# Altium PCB Device.PcbDoc (part 1 of 4)
Units mm, origin at the board's own origin, x right, y up, seen from the top; angles counter-clockwise.
Board outline 139.06 x 99.82 mm, 4 copper layers (Top Layer, GND, PWR, Bottom Layer), stack 1.233 mm thick; 189 components, 163 nets, 636 pads, 1007 vias.
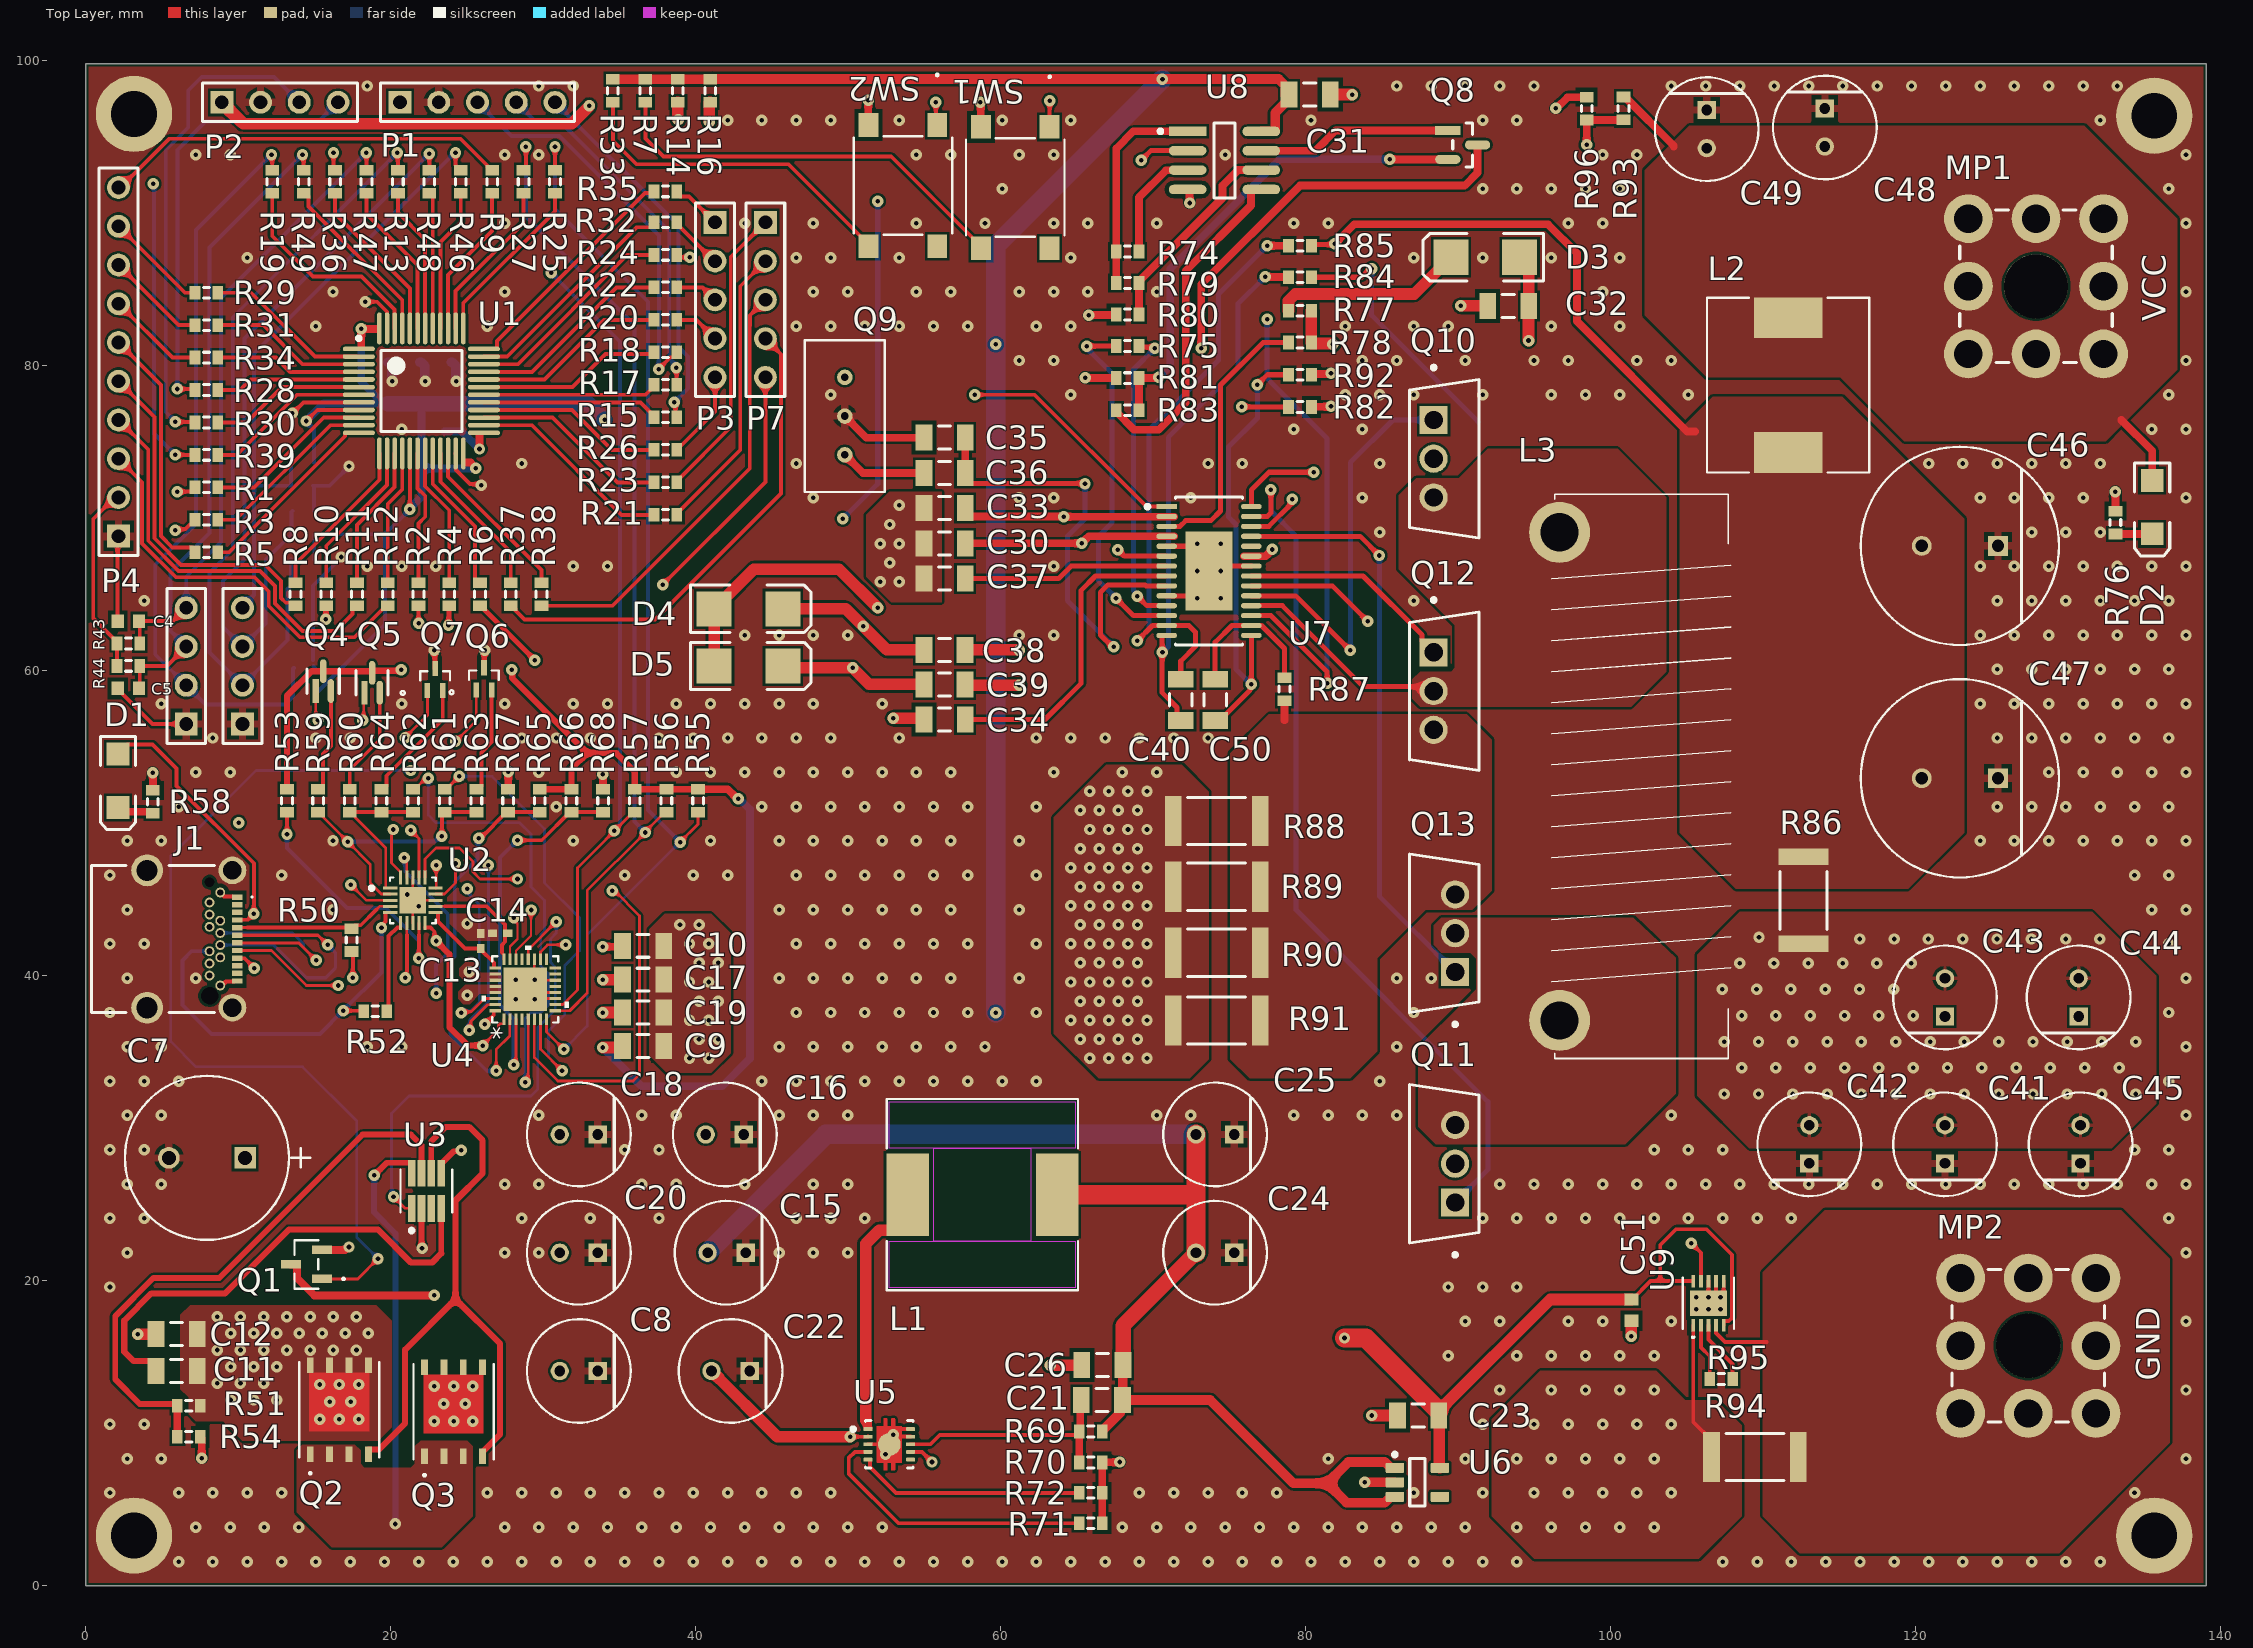
[diagram p0: Top Layer view]
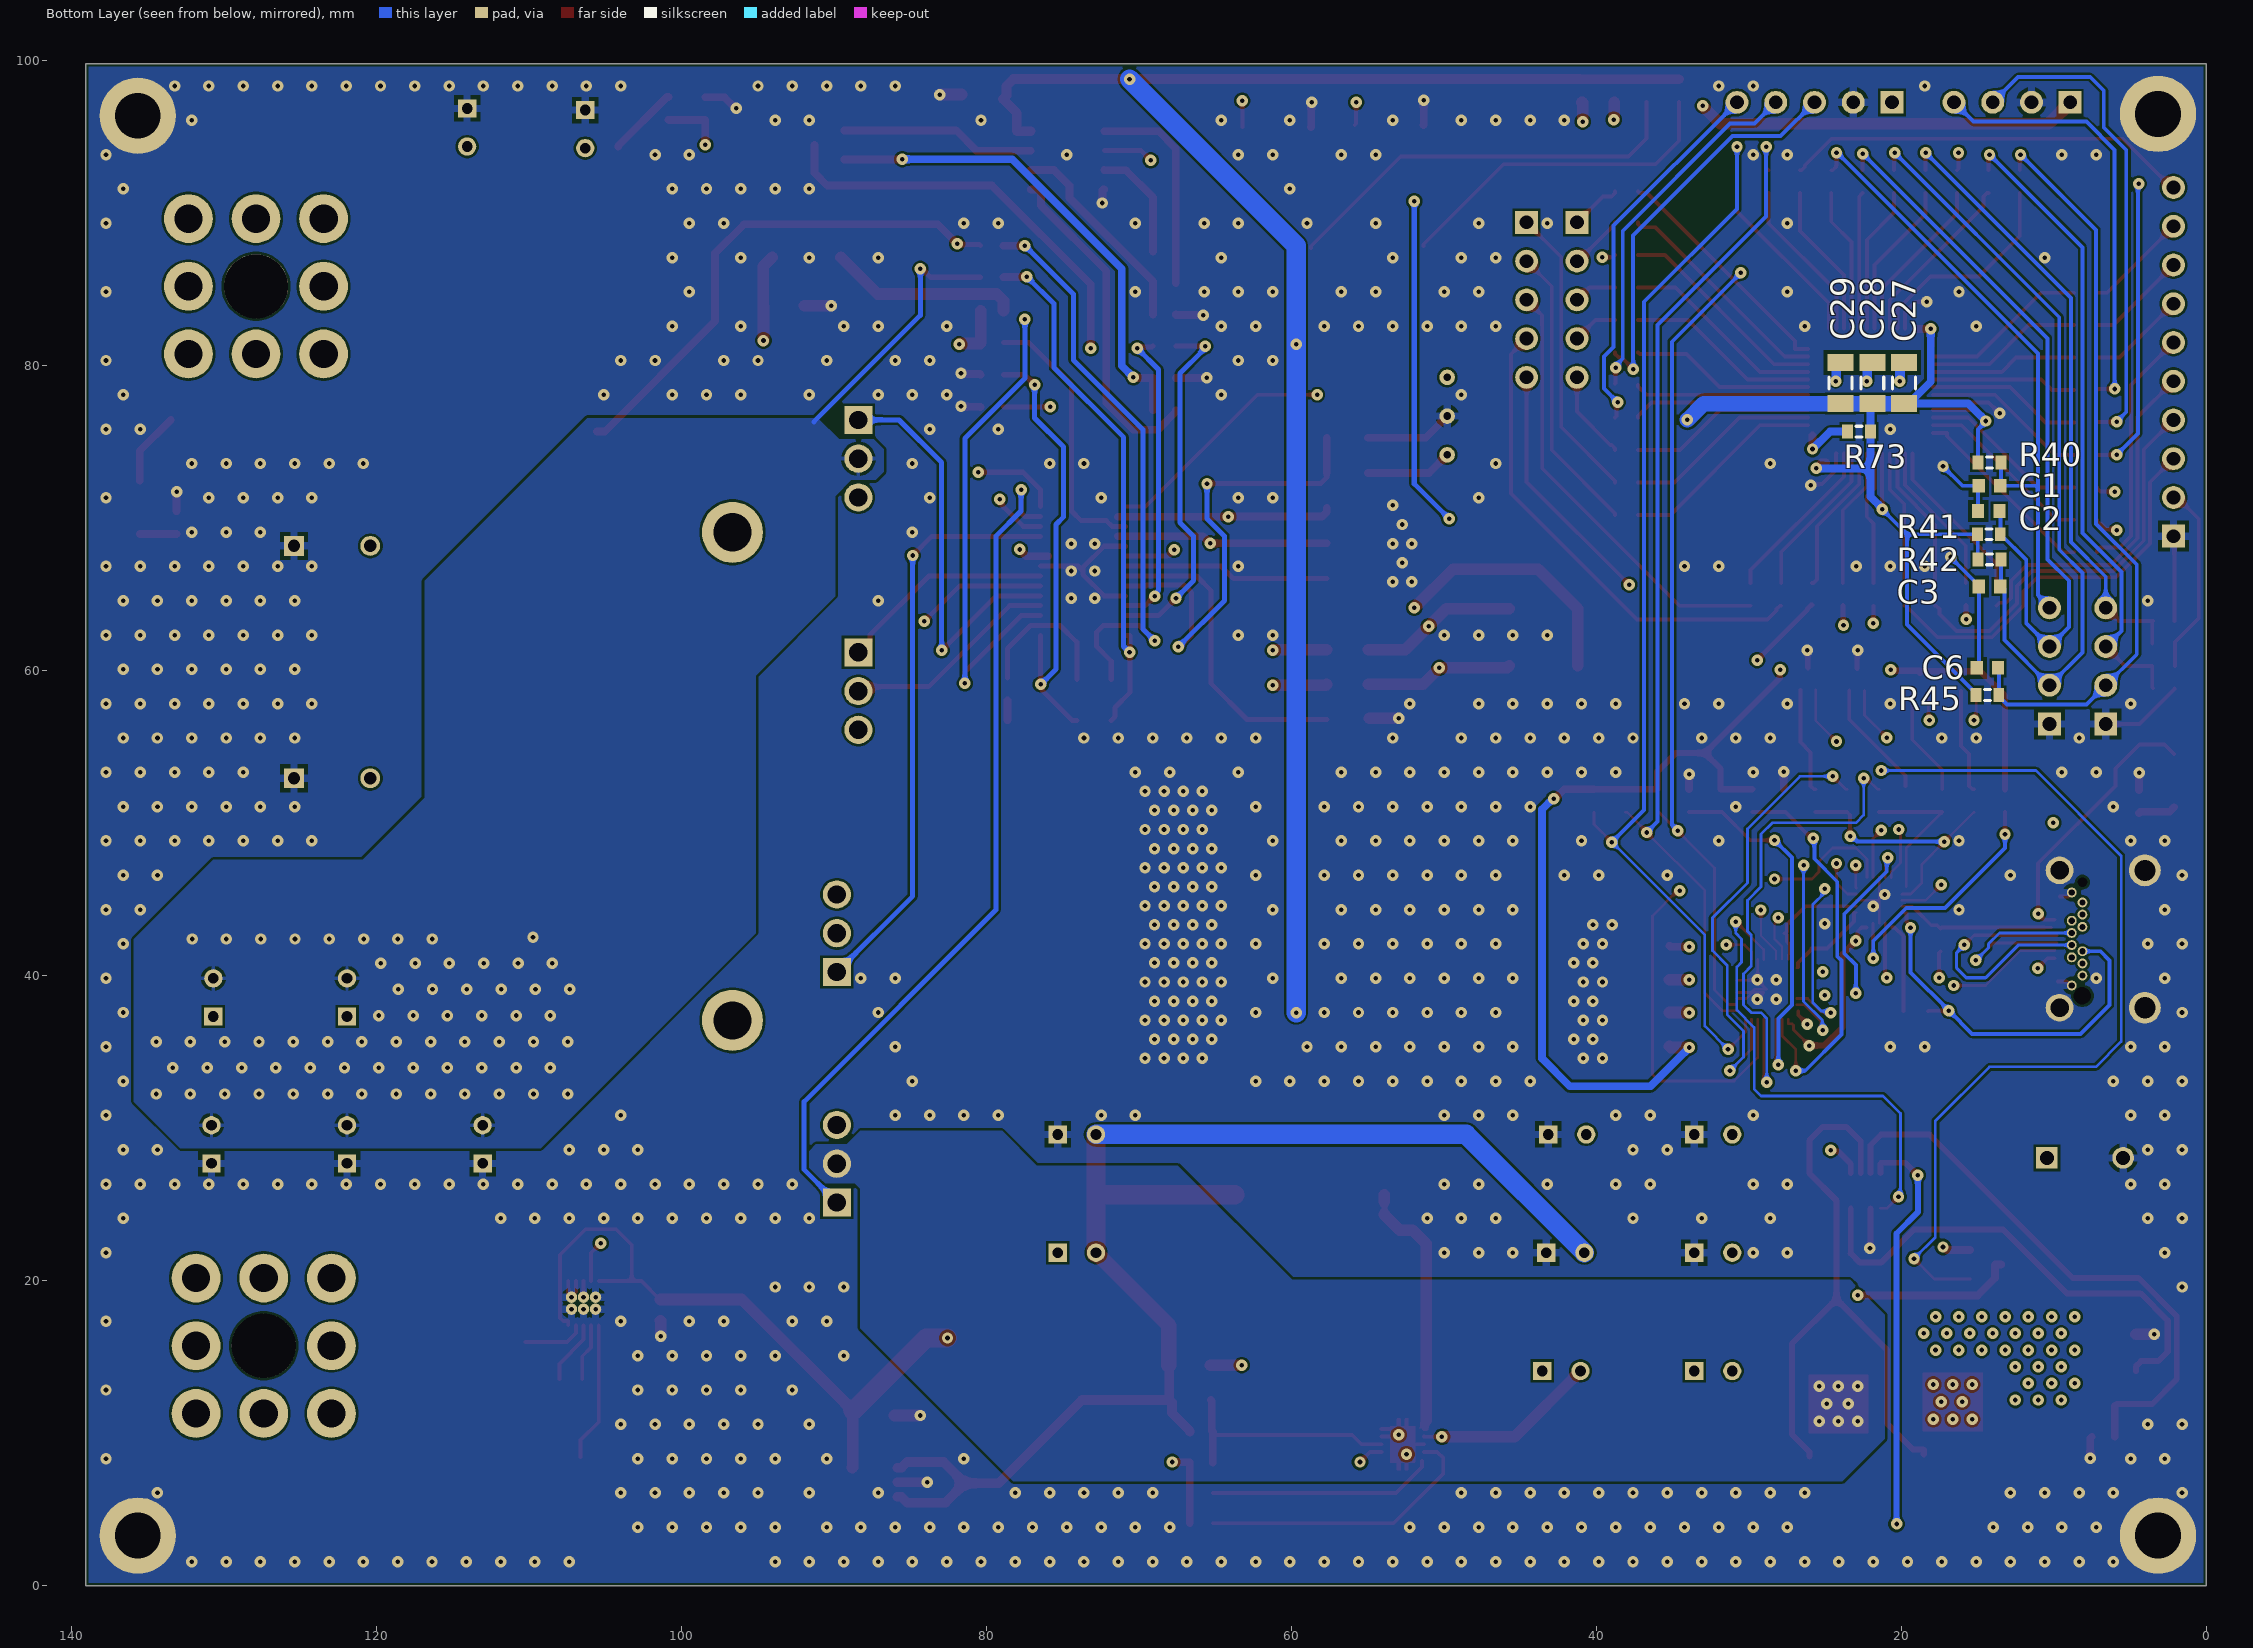
[diagram p1: Bottom Layer view, seen from below]
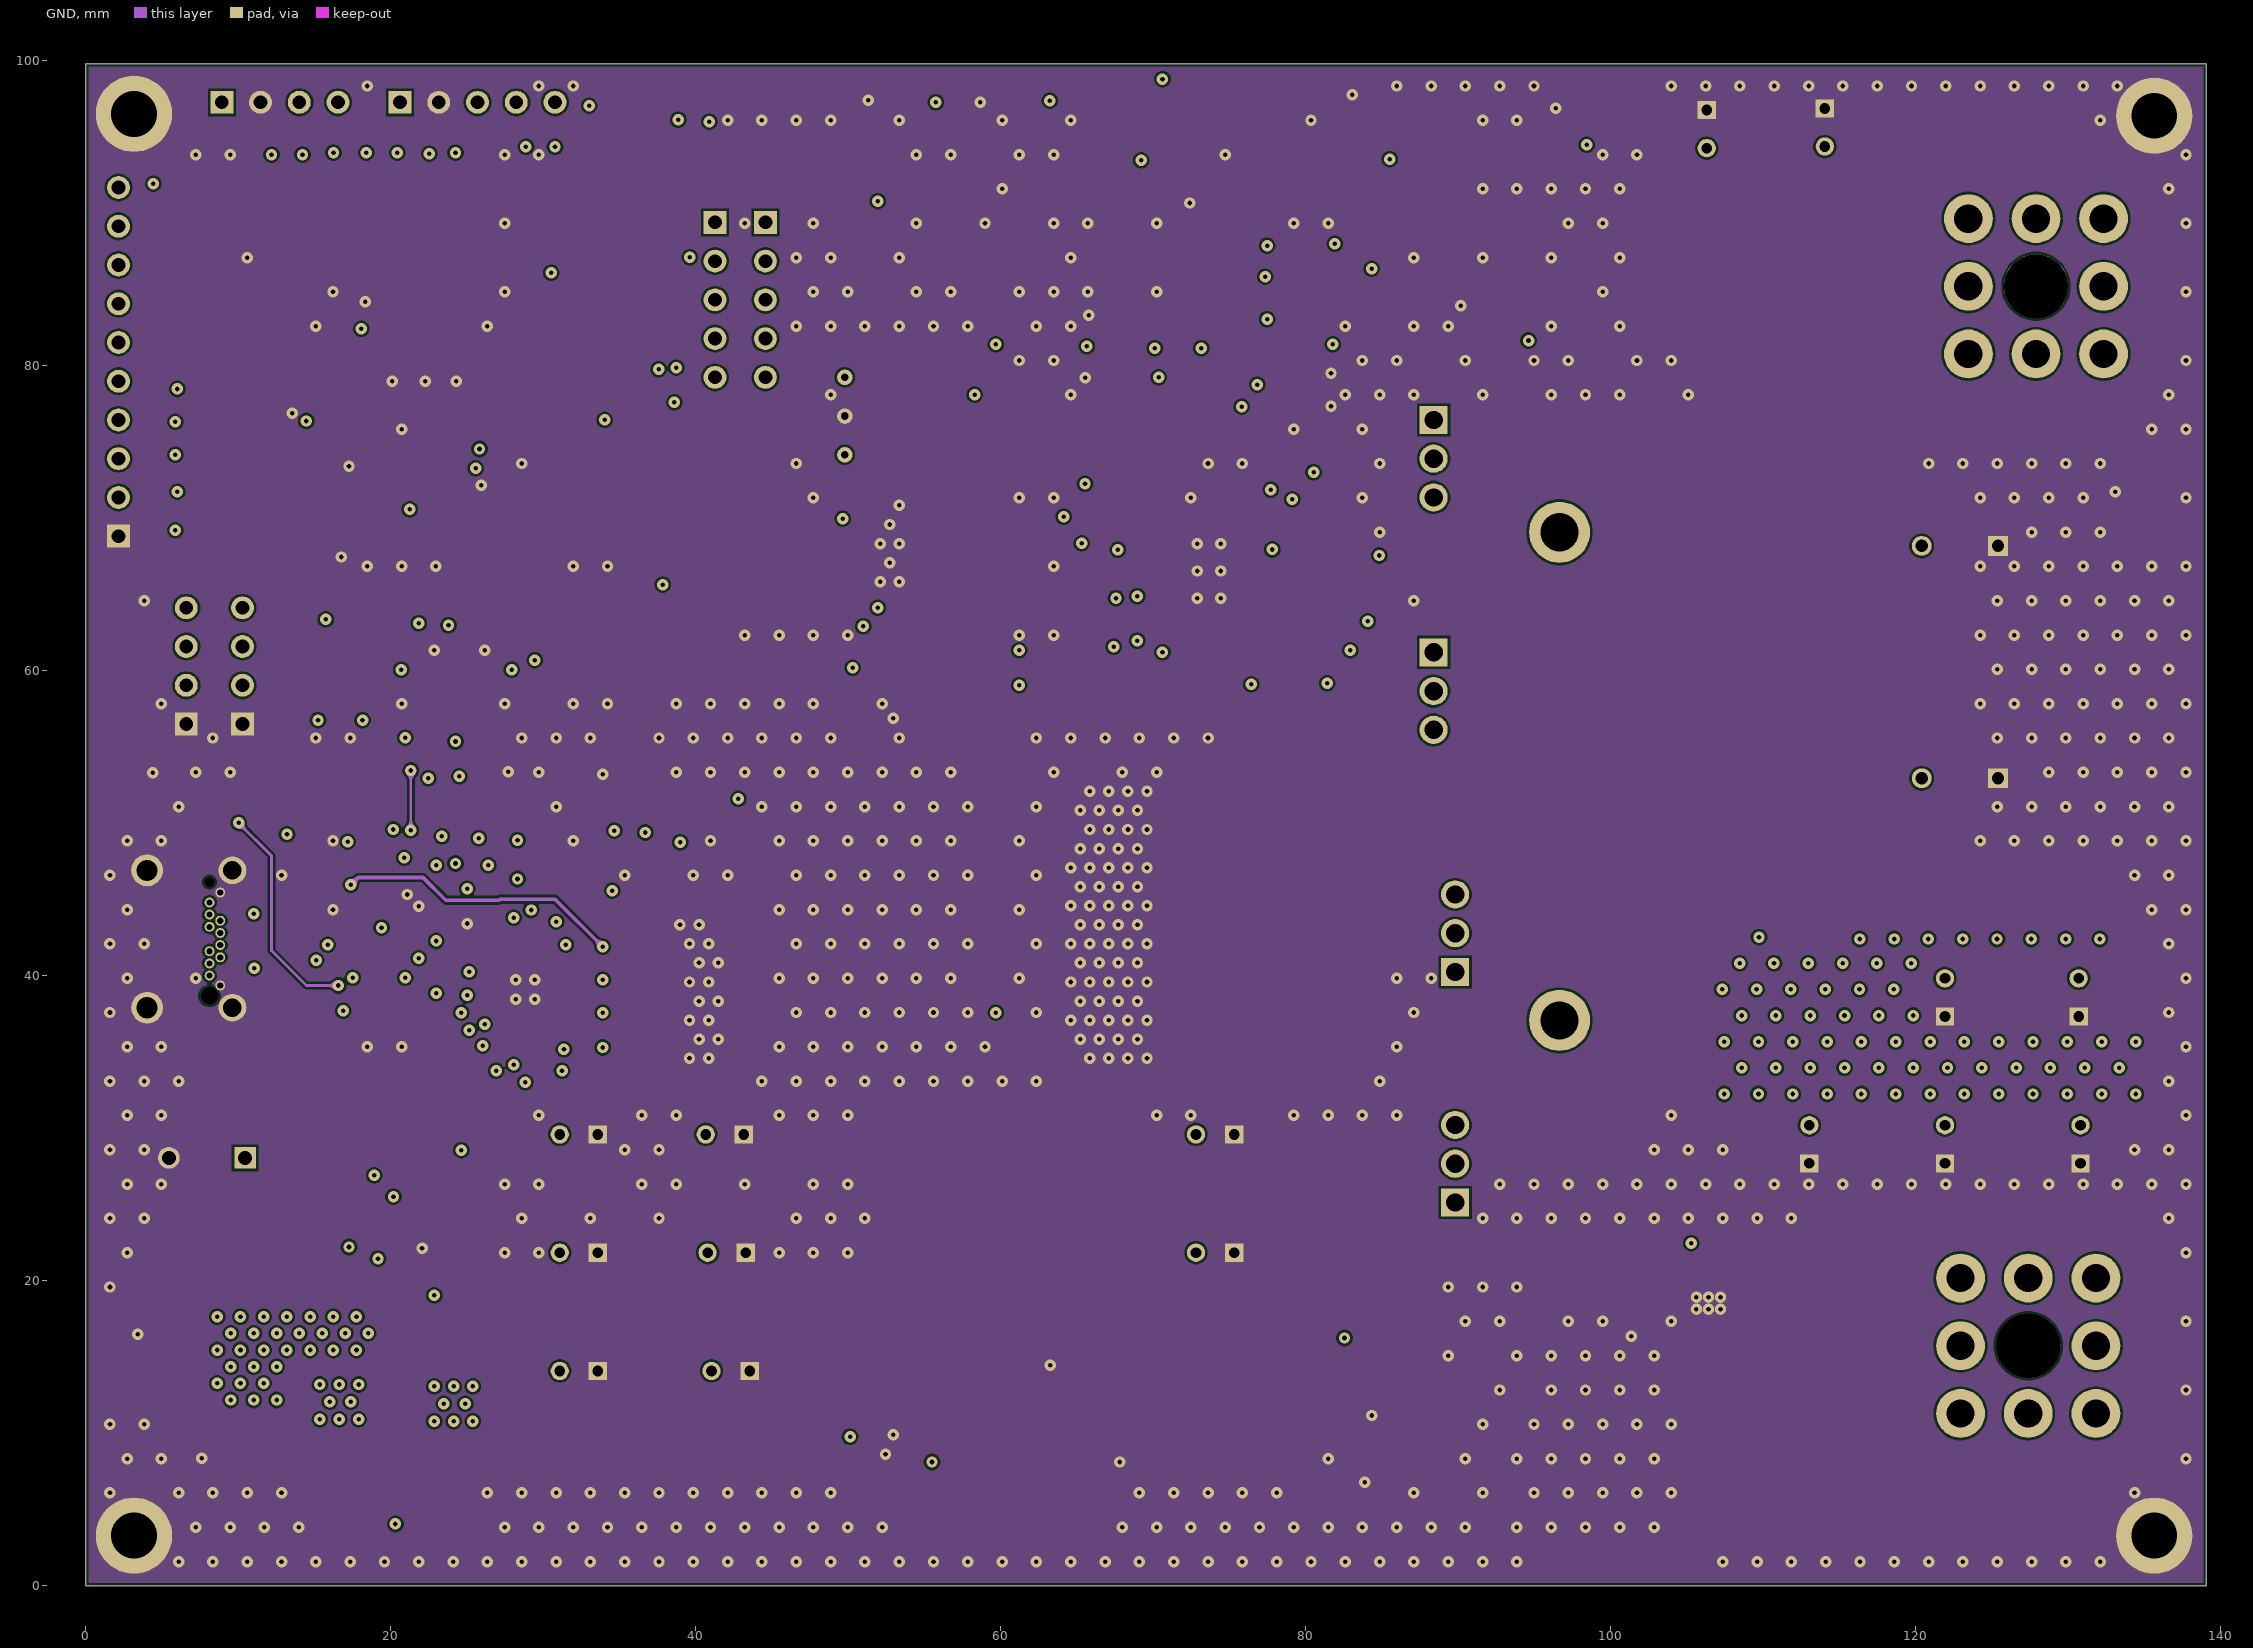
[diagram p2: GND]
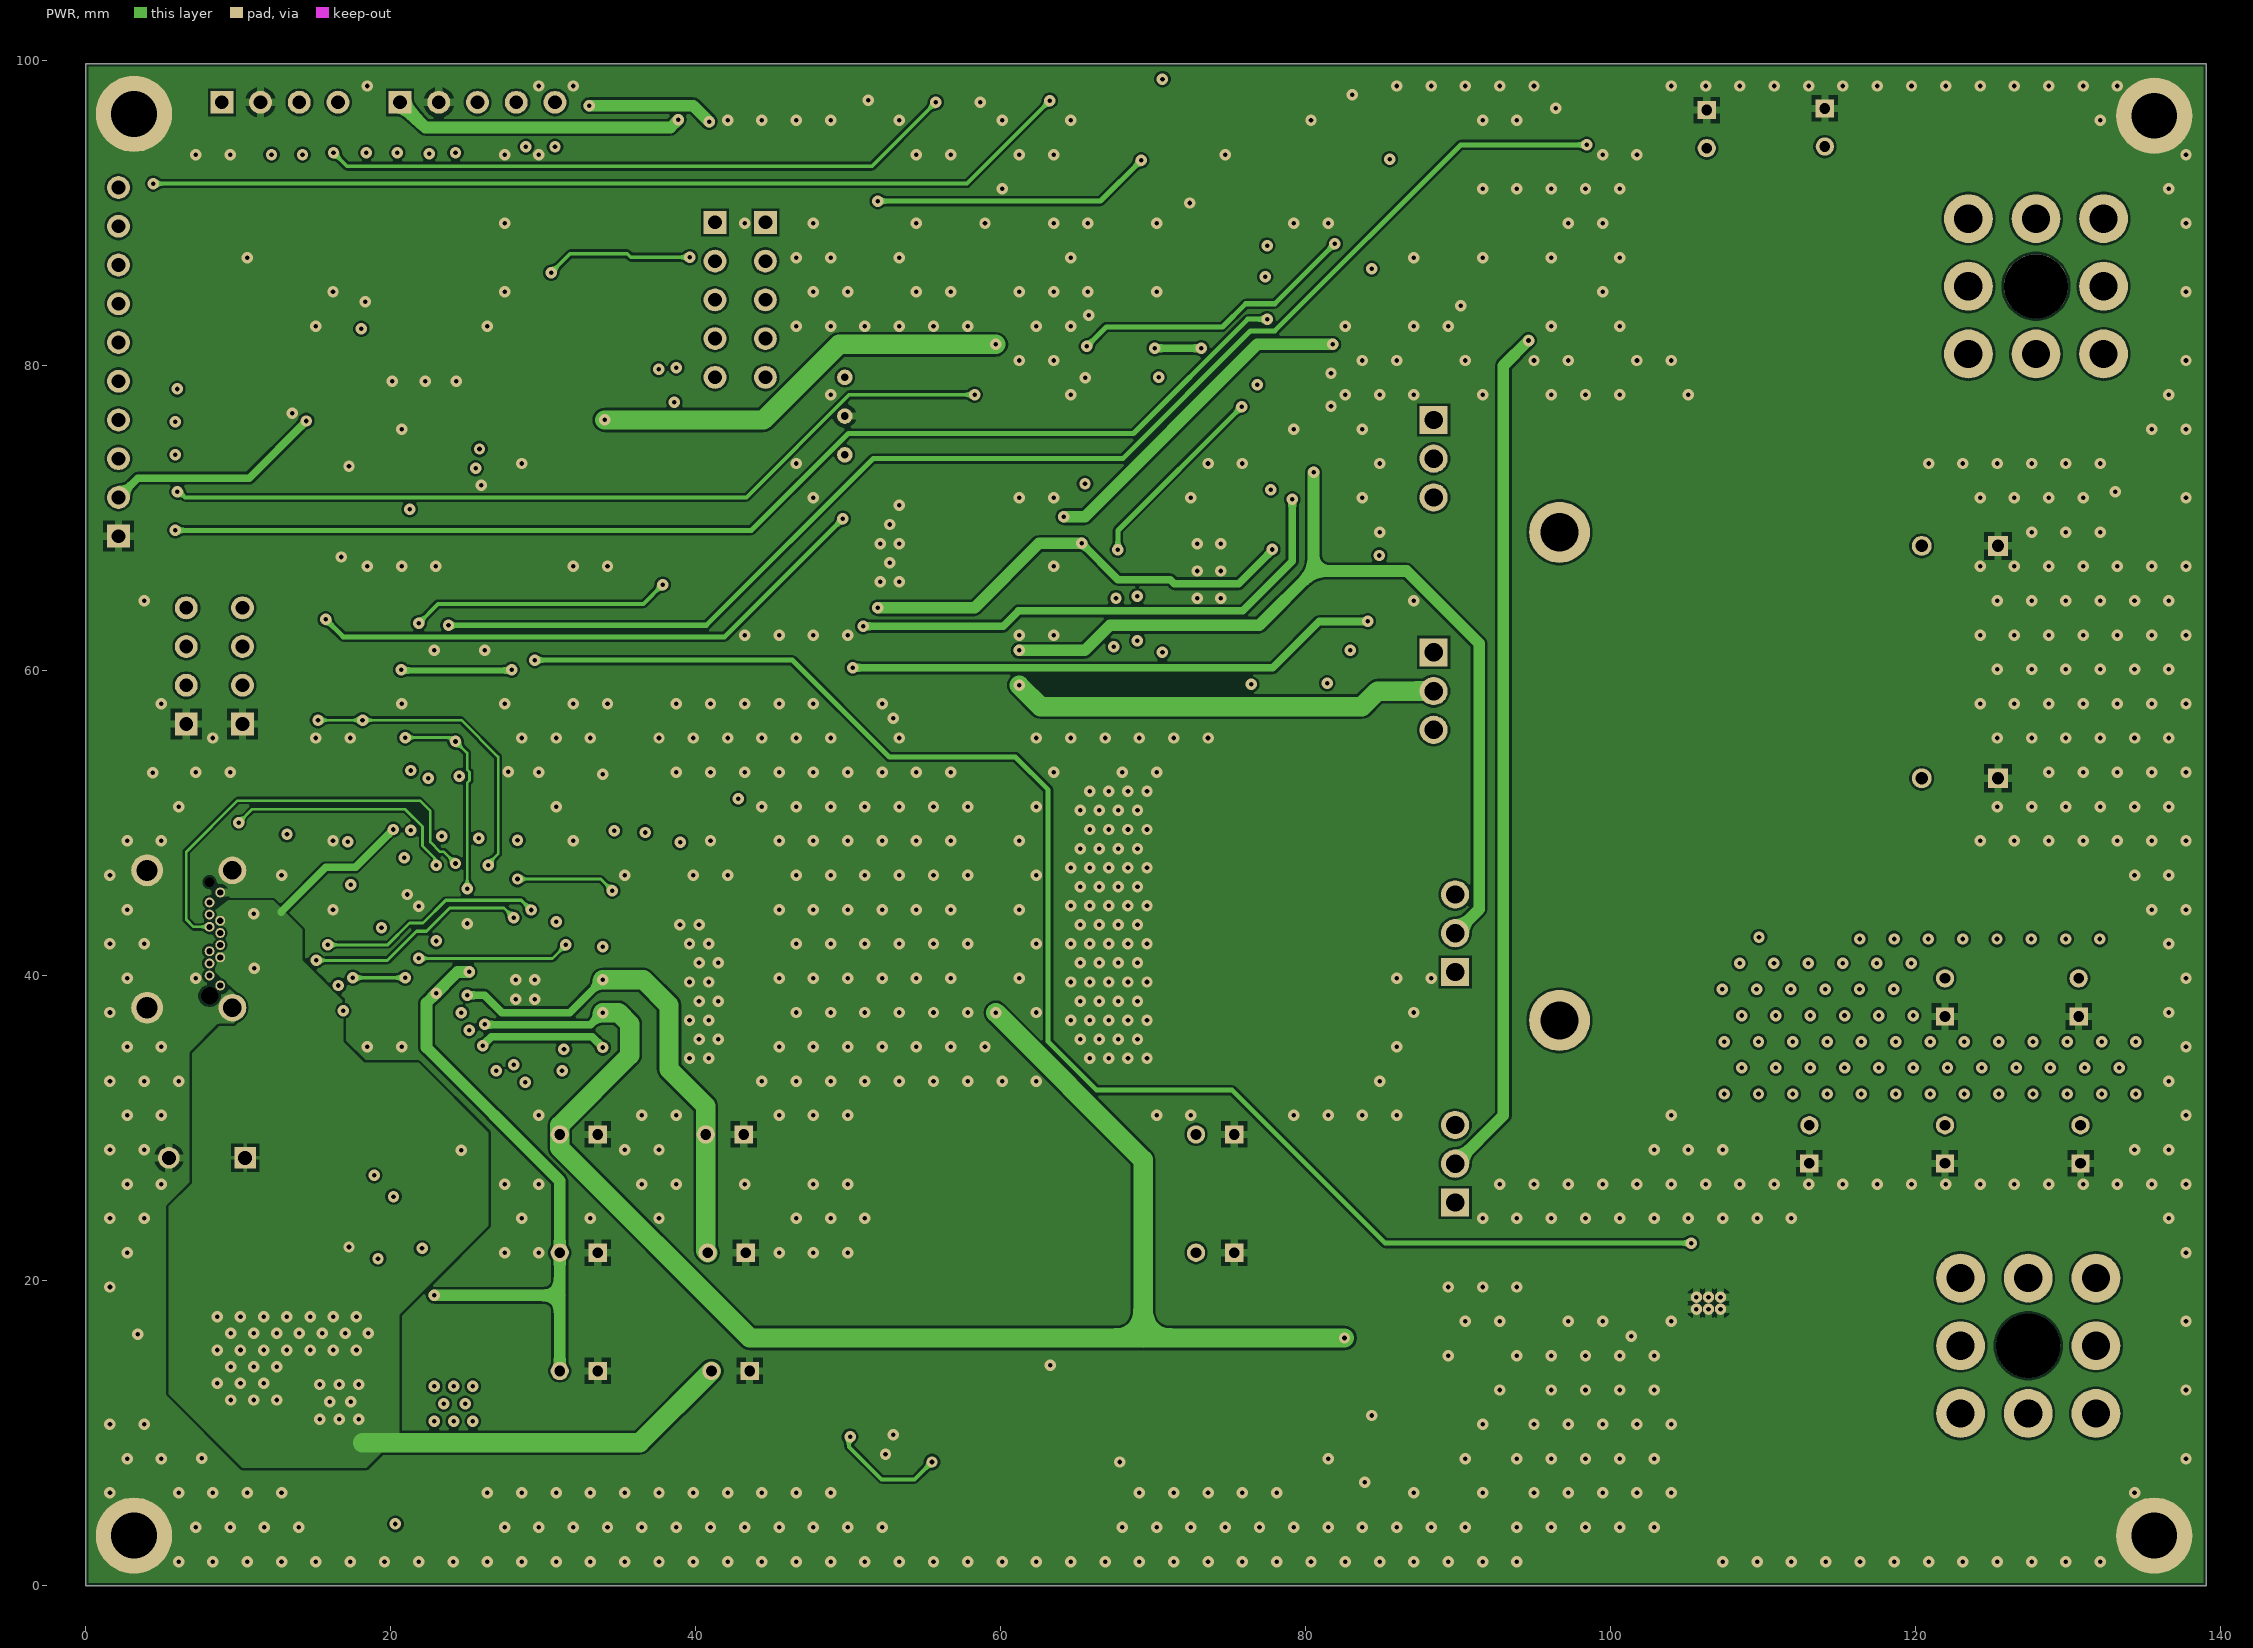
[diagram p3: PWR]

## Layer stack, top to bottom
Top Solder: solder mask 0.0102, Solder Resist, Dk 3.5
Top Layer: signal copper 0.0356
Dielectric 4: prepreg 0.0762, PP-007, Dk 4.2
Dielectric 2: prepreg 0.0762, PP-007, Dk 4.2
GND: signal copper 0.035
Dielectric 1: core 0.7874, Core-040, Dk 4.6
PWR: signal copper 0.035
Dielectric 3: prepreg 0.0762, PP-007, Dk 4.2
Dielectric 5: prepreg 0.0762, PP-007, Dk 4.2
Bottom Layer: signal copper 0.0356
Bottom Solder: solder mask 0.0102, Solder Resist, Dk 3.5

## Board outline
0,0 139.065,0 139.065,99.822 0,99.822

## Design rules (kind name [scope] priority, off if disabled: settings)
BoardOutlineClearance [All] p1: gap=0.2 ignorepadtopadclearanceinfootprint=FALSE
Clearance [All] p1: gap=0.152 ignorepadtopadclearanceinfootprint=TRUE
ComponentClearance [All] p1: gap=0.127 collisioncheckmode=3 verticalgap=0.127 showdistances=TRUE
DiffPairsRouting [All] p1: maxlimit=0.254 minlimit=0.127 mostfreqgap=0.254 toplayer_prefgap=0.127 toplayer_minwidth=0.127 toplayer_maxwidth=25.4 toplayer_prefwidth=0.127 midlayer1_mingap=0.254 midlayer1_minwidth=0.381 midlayer1_maxwidth=0.381 midlayer1_prefwidth=0.381 midlayer2_mingap=0.254 midlayer2_minwidth=0.381 midlayer2_maxwidth=0.381 midlayer2_prefwidth=0.381 bottomlayer_prefgap=0.127 bottomlayer_minwidth=0.127 bottomlayer_maxwidth=25.4 bottomlayer_prefwidth=0.127 maxuncoupledlength=12.7
Height [All] p1: minheight=0 maxheight=1816.048 prefheight=12.7
HoleSize [All] p1: absolutevalues=TRUE maxlimit=6.3 minlimit=0.3 maxpercent=80.000 minpercent=20.000
HoleToHoleClearance [All] p1: gap=0.2 allowstackedmicrovias=FALSE
MinimumAnnularRing [All] p1: minimumring=0.076
MinimumSolderMaskSliver [All] p1: minsoldermaskwidth=0
PlaneClearance [All] p1: clearance=0.254
PlaneConnect PlaneConnectPowerPads [InPadClass('PowerPads')] p1: planeconnectstyle=Direct reliefexpansion=0.508 reliefentries=4 reliefconductorwidth=0.254 reliefairgap=0.254
PlaneConnect [All] p2: pad.planeconnectstyle=Relief pad.reliefexpansion=0.3 pad.reliefentries=4 pad.reliefconductorwidth=0.127 pad.reliefairgap=0.127 via.planeconnectstyle=Direct via.reliefexpansion=0.3 via.reliefentries=4 via.reliefconductorwidth=0.127 via.reliefairgap=0.127
PolygonConnect PolygonConnect_1 [(InNet('GND') AND ISNamedPolygon('GND'))] p1: connectstyle=Direct reliefconductorwidth=0.254 reliefentries=4 polygonreliefangle="90 Angle" airgapwidth=0.254
PolygonConnect GND [InNet('GND')] p2: thpad.connectstyle=Relief thpad.reliefconductorwidth=0.508 thpad.reliefentries=4 thpad.polygonreliefangle="90 Angle" thpad.airgapwidth=0.254 smdpad.connectstyle=NoConnect smdpad.reliefconductorwidth=0.254 smdpad.reliefentries=4 smdpad.polygonreliefangle="90 Angle" smdpad.airgapwidth=0.254 via.connectstyle=Direct via.reliefconductorwidth=0.254 via.reliefentries=4 via.polygonreliefangle="90 Angle" via.airgapwidth=0.254
PolygonConnect VOUT- [InNet('VOUT-')] p3: connectstyle=Direct reliefconductorwidth=0.254 reliefentries=4 polygonreliefangle="90 Angle" airgapwidth=0.254
PolygonConnect PPEXT [InNet('PPEXT')] p4: connectstyle=Direct reliefconductorwidth=0.254 reliefentries=4 polygonreliefangle="90 Angle" airgapwidth=0.254
PolygonConnect VOSNS [InNet('VOSNS')] p5: connectstyle=Direct reliefconductorwidth=0.254 reliefentries=4 polygonreliefangle="90 Angle" airgapwidth=0.254
PolygonConnect NetC34_2 [InNet('NetC34_2')] p6: connectstyle=Direct reliefconductorwidth=0.254 reliefentries=4 polygonreliefangle="90 Angle" airgapwidth=0.254
PolygonConnect VOUT+ [InNet('VOUT+')] p7: connectstyle=Direct reliefconductorwidth=0.254 reliefentries=4 polygonreliefangle="90 Angle" airgapwidth=0.254
PolygonConnect NetQ12_3 [InNet('NetQ12_3')] p8: connectstyle=Direct reliefconductorwidth=0.254 reliefentries=4 polygonreliefangle="90 Angle" airgapwidth=0.254
PolygonConnect U9 [InUnion('2')] p9: connectstyle=Relief reliefconductorwidth=0.254 reliefentries=4 polygonreliefangle="90 Angle" airgapwidth=0.254
PolygonConnect SW2 [InNet('SW2')] p10: connectstyle=Direct reliefconductorwidth=0.254 reliefentries=4 polygonreliefangle="90 Angle" airgapwidth=0.254
PolygonConnect SW1 [InNet('SW1')] p11: connectstyle=Direct reliefconductorwidth=0.254 reliefentries=4 polygonreliefangle="90 Angle" airgapwidth=0.254
PolygonConnect PolygonConnectPowerPads [All vs (InPadClass('PowerPads'))] p12: connectstyle=Direct reliefconductorwidth=0.254 reliefentries=4 polygonreliefangle="90 Angle" airgapwidth=0.254
PolygonConnect [All] p13: thpad.connectstyle=Relief thpad.reliefconductorwidth=0.254 thpad.reliefentries=4 thpad.polygonreliefangle="90 Angle" thpad.airgapwidth=0.203 smdpad.connectstyle=Direct smdpad.reliefconductorwidth=0.254 smdpad.reliefentries=4 smdpad.polygonreliefangle="90 Angle" smdpad.airgapwidth=0.203 via.connectstyle=Direct via.reliefconductorwidth=0.254 via.reliefentries=4 via.polygonreliefangle="90 Angle" via.airgapwidth=0.203
RoutingVias [All] p1: holewidth=0.3 width=0.75 viastyle="Through Hole" minholewidth=0.25 minwidth=0.75 maxholewidth=0.6 maxwidth=6.6
SilkToSilkClearance [All] p1: silktosilkclearance=0
SilkToSolderMaskClearance [IsPad] p1: minsilkscreentomaskgap=0.076 clearancetoexposedcopper=TRUE
SolderMaskExpansion Tented_vias [IsVia] p1: expansion=0.102 istentingtop=TRUE
SolderMaskExpansion [All] p2: expansion=0.075 istentingtop=FALSE
SupplyNets "Schematic Supply Nets_10" [InNet('3V3')] p1: voltage=0.000
SupplyNets "Schematic Supply Nets_9" [InNet('VBUS')] p2: voltage=0.000
SupplyNets "Schematic Supply Nets_8" [InNet('LDO_3V3')] p3: voltage=0.000
SupplyNets "Schematic Supply Nets_7" [InNet('PPEXT')] p4: voltage=0.000
SupplyNets "Schematic Supply Nets_6" [InNet('VOUT-')] p5: voltage=0.000
SupplyNets "Schematic Supply Nets_5" [InNet('VCC')] p6: voltage=0.000
SupplyNets "Schematic Supply Nets_4" [InNet('VBUS_LV')] p7: voltage=0.000
SupplyNets "Schematic Supply Nets_3" [InNet('LDO_1V5')] p8: voltage=0.000
SupplyNets "Schematic Supply Nets_2" [InNet('5V')] p9: voltage=0.000
SupplyNets "Schematic Supply Nets_1" [InNet('VOUT+')] p10: voltage=0.000
SupplyNets "Schematic Supply Nets" [InNet('GND')] p11: voltage=0.000
Width [All] p1: maxlimit=25.4 minlimit=0.152 preferedwidth=0.254 minimp=50.000000 maximp=50.000000 favimp=50.000000
20 further rules are at their usual default settings.

## Classes and differential pairs
component class USB: C7 C8 C9 C10 C11 C12 C13 C14 C15 C16 C17 C18 C19 C20 J1 Q1 Q2 Q3 Q4 Q5 Q6 Q7 R50 R51 R52 R53 R54 R55 R56 R57 R58 R59 R60 R61 R62 R63 R64 R65 R66 R67 R68 U2 U3 U4
component class STM32F373: C2 C3 P1 P2 P7 R1 R2 R3 R4 R5 R6 R7 R8 R9 R10 R11 R12 R13 R14 R15 R16 R17 R18 R19 R20 R21 R22 R23 R24 R25 R26 R27 R28 R29 R30 R31 R32 R33 R34 R35 R36 R37 R38 R39 R41 R46 R47 R48 R49 SW1 SW2 U1
component class "Power Supply for Logic": C21 C22 C23 C24 C25 C26 C27 C28 C29 L1 R69 R70 R71 R72 R73 U5 U6
component class "Output Connector": C51 MP1 MP2 R93 R94 R95 R96 U9
component class "DC-DC converter": C30 C31 C32 C33 C34 C35 C36 C37 C38 C39 C40 C41 C42 C43 C44 C45 C46 C47 C48 C49 C50 D2 D3 D4 D5 L2 L3 Q8 Q9 Q10 Q11 Q12 Q13 R74 R75 R76 R77 R78 R79 R80 R81 R82 R83 R84 R85 R86 R87 R88 R89 R90 R91 R92 U7 U8

## Components (designator, comment, footprint, x,y, rotation, side; value= is the part's Value field where it differs from the comment)
C1 "Cap Semi" 1608[0603] 14.224,72.136 r180 bottom value=10nF
C2 "Cap Semi" 1608[0603] 14.274,70.485 r180 bottom value=10nF
C3 "Cap Semi" 1608[0603] 14.224,65.532 r180 bottom value=10nF
C4 "Cap Semi" 1608[0603] 2.806,63.259 r0 top value=10nF
C5 "Cap Semi" 1608[0603] 2.806,58.858 r0 top value=10nF
C6 "Cap Semi" 1608[0603] 14.363,60.198 r180 bottom value=10nF
C7 "EEU-FR2A101B" CAP_EEU-FR2A101B_PAN 10.461,28.067 r180 top
C8 "EEU-FR1J470" FP-EEU-FR1J470-MFG 32.341,14.097 r180 top
C9 "25V" C1206 36.557,35.397 r180 top value=0.1uF
C10 "100V" C1206 36.557,41.974 r180 top value=0.47uF
C11 "at least 13V" C1206 5.969,14.097 r0 top value=20nF
C12 "Cap Semi" C1206 5.969,16.51 r0 top value=100nF
C13 "Cap Semi" 0402 25.908,42.291 r270 top value=220pF
C14 "Cap Semi" 0402 27.178,42.799 r0 top value=220pF
C15 "EEU-FR1J470" FP-EEU-FR1J470-MFG 42.037,21.852 r180 top
C16 "EEU-FR1J470" FP-EEU-FR1J470-MFG 41.915,29.607 r180 top
C17 "Cap Semi" C1206 36.557,39.751 r180 top value=100nF
C18 "EEU-FR1J470" FP-EEU-FR1J470-MFG 32.341,29.607 r180 top
C19 "Cap Semi" C1206 36.557,37.6 r180 top value=100nF
C20 "EEU-FR1J470" FP-EEU-FR1J470-MFG 32.341,21.852 r180 top
C21 "Cap Semi" C1206 66.642,12.192 r0 top value=100pF
C22 "EEU-FR1J470" FP-EEU-FR1J470-MFG 42.291,14.097 r180 top
C23 "Cap Semi" C1206 87.376,11.176 r0 top value=1uF
C24 "EEU-FR1J470" FP-EEU-FR1J470-MFG 74.061,21.852 r180 top
C25 "EEU-FR1J470" FP-EEU-FR1J470-MFG 74.061,29.607 r180 top
C26 "Cap Semi" C1206 66.675,14.478 r0 top value=1uF
C27 "Cap Semi" C1206 19.824,78.878 r270 bottom value=10u
C28 "Cap Semi" C1206 21.907,78.878 r270 bottom value=10nF
C29 "Cap Semi" C1206 23.991,78.878 r270 bottom value=1uF
C30 "16V" C1206 56.327,68.362 r0 top value=2.2uF
C31 "Cap Semi" C1206 80.264,97.79 r180 top value=100nF
C32 "Cap Semi" C1206 93.284,83.934 r0 top value=68uF
C33 "Cap Semi" C1206 56.327,70.673 r0 top value=100nF
C34 "Cap Semi" C1206 56.327,56.81 r180 top value=12pF
C35 "Cap Semi" C1206 56.327,75.294 r0 top value=560p
C36 "Cap Semi" C1206 56.327,72.983 r0 top value=33nF
C37 "Cap Semi" C1206 56.327,66.052 r180 top value=1nF
C38 "Cap Semi" C1206 56.322,61.378 r180 top value=100n
C39 "Cap Semi" C1206 56.322,59.117 r180 top value=100n
C40 "Cap Semi" C1206 71.81,58.1 r90 top value=1uF
C41 "EEU-FR1J470" FP-EEU-FR1J470-MFG 121.92,28.956 r90 top
C42 "EEU-FR1J470" FP-EEU-FR1J470-MFG 113.03,28.956 r90 top
C43 "EEU-FR1J470" FP-EEU-FR1J470-MFG 121.92,38.588 r90 top
C44 "EEU-FR1J470" FP-EEU-FR1J470-MFG 130.683,38.588 r90 top
C45 "EEU-FR1J470" FP-EEU-FR1J470-MFG 130.81,28.956 r90 top
C46 "EEUFR1J471" FP-RAD-TH-D_12_5_0_5-L_25-MFG 122.896,68.199 r180 top
C47 "EEUFR1J471" FP-RAD-TH-D_12_5_0_5-L_25-MFG 122.896,52.959 r180 top
C48 "EEU-FR1J470" FP-EEU-FR1J470-MFG 114.046,95.631 r270 top
C49 "EEU-FR1J470" FP-EEU-FR1J470-MFG 106.299,95.524 r270 top
C50 "Cap Semi" C1206 74.072,58.1 r90 top value=47p
C51 "" 1608[0603] 101.367,18.085 r90 top value=0.1uF
D1 "Blue" 3.2X1.6X1.1 2.128,52.802 r270 top
D2 "Blue" 3.2X1.6X1.1 135.509,70.739 r270 top
D3 "D Schottky" SMB 91.785,87.122 r180 top
D4 "D Schottky" SMB 43.47,64.072 r0 top
D5 "D Schottky" SMB 43.47,60.325 r0 top
J1 "UJ32-C-H-G-SMT-TR" UJ32CHGSMTTR 5.461,42.418 r270 top
L1 "DE1205-560" IND_DE1205_FRC 58.801,25.654 r180 top
L2 "ETQ-P5M1R5YFC" IND_PCC-M1054M_PAN 111.633,78.74 r270 top
L3 "Coil" 744711003 96.647,37.084 r90 top
MP1 "74650094" 74650094 127.889,85.217 r0 top
MP2 "74650094" 74650094 127.381,15.748 r0 top
P1 "USART" HDR1X5 20.622,97.281 r0 top
P2 "I2C" HDR1X4 8.935,97.282 r0 top
P3 "Header 5" HDR1X5 41.275,89.408 r270 top
P4 "Header 10" HDR1X10 2.159,68.834 r90 top
P5 "ENC1" HDR1X4 10.287,56.515 r90 top
P6 "ENC2" HDR1X4 6.604,56.515 r90 top
P7 "Header 5" HDR1X5 44.577,89.408 r270 top
Q1 "SI2308CDS-T1-GE3" SOT-23_TO-236_VIS 14.478,21.082 r90 top
Q2 "SIR4608DP-T1-GE3" POWERPAK_SO-8_SINGLE_VIS 16.637,11.557 r90 top
Q3 "SIR4608DP-T1-GE3" POWERPAK_SO-8_SINGLE_VIS 24.13,11.43 r90 top
Q4 "DMG1013T-7" FP-SOT523-IPC_A 15.583,59.332 r90 top
Q5 "DMG1013T-7" FP-SOT523-IPC_A 18.789,59.22 r90 top
Q6 "DMN2004TK-7" SOT523_DMN2004_DIO 26.124,59.474 r0 top
Q7 "DMN2004TK-7" SOT523_DMN2004_DIO 22.918,59.436 r0 top
Q8 "BC846A,215" FP-SOT23-IPC_A 90.297,94.488 r0 top
Q9 "T93YA503KT20" TRIM_503KT20_VIS 49.784,74.168 r90 top
Q10 "IRF2805PBF" FP-PG-TO220-3-MFG 89.097,73.914 r0 top
Q11 "IRF2805PBF" FP-PG-TO220-3-MFG 89.097,27.686 r180 top
Q12 "IRF2805PBF" FP-PG-TO220-3-MFG 89.097,58.674 r0 top
Q13 "IRF2805PBF" FP-PG-TO220-3-MFG 89.097,42.799 r180 top
R1 "" J1-0603 7.922,72.033 r180 top value=0
R2 "" J1-0603 21.828,65.023 r90 top value=0
R3 "" J1-0603 7.922,69.906 r180 top value=0
R4 "" J1-0603 23.844,65.023 r90 top value=0
R5 "" J1-0603 7.922,67.779 r180 top value=0
R6 "" J1-0603 25.86,65.023 r90 top value=0
R7 "" J1-0603 36.703,98.044 r270 top value=10k
R8 "" J1-0603 13.764,65.023 r270 top value=0
R9 "" J1-0603 26.661,92.074 r270 top value=0
R10 "" J1-0603 15.78,65.023 r270 top value=0
R11 "" J1-0603 17.796,65.023 r270 top value=0
R12 "" J1-0603 19.812,65.023 r270 top value=0
R13 "" J1-0603 20.48,92.074 r270 top value=0
R14 "Res3" J1-0603 38.834,98.044 r90 top value=0
R15 "" J1-0603 38.021,76.623 r0 top value=0
R16 "Res3" J1-0603 40.965,98.044 r90 top value=0
R17 "" J1-0603 38.021,78.754 r0 top value=0
R18 "" J1-0603 38.021,80.884 r0 top value=0
R19 "" J1-0603 12.24,92.074 r270 top value=0
R20 "" J1-0603 38.021,83.015 r0 top value=0
R21 "" J1-0603 38.021,70.23 r180 top value=0
R22 "" J1-0603 38.021,85.146 r0 top value=0
R23 "" J1-0603 38.021,72.361 r180 top value=0
R24 "" J1-0603 38.021,87.277 r0 top value=0
R25 "" J1-0603 30.782,92.074 r90 top value=0
R26 "" J1-0603 38.021,74.492 r180 top value=0
R27 "" J1-0603 28.721,92.074 r90 top value=0
R28 "" J1-0603 7.922,78.415 r0 top value=0
R29 "" J1-0603 7.922,84.797 r180 top value=0
R30 "" J1-0603 7.922,76.288 r0 top value=0
R31 "" J1-0603 7.922,82.67 r180 top value=0
R32 "" J1-0603 38.021,89.408 r180 top value=0
R33 "" J1-0603 34.572,98.044 r270 top value=10k
R34 "" J1-0603 7.922,80.542 r180 top value=0
R35 "" J1-0603 38.021,91.44 r180 top value=0
R36 "" J1-0603 16.36,92.074 r270 top value=0
R37 "" J1-0603 27.876,65.023 r270 top value=0
R38 "" J1-0603 29.893,65.023 r270 top value=0
R39 "" J1-0603 7.922,74.161 r0 top value=0
R40 "" J1-0603 14.224,73.66 r180 bottom value=10k
R41 "" J1-0603 14.263,68.961 r180 bottom value=10k
R42 "" J1-0603 14.224,67.31 r180 bottom value=10k
R43 "" J1-0603 2.806,61.792 r0 top value=10k
R44 "" J1-0603 2.806,60.325 r0 top value=10k
R45 "" J1-0603 14.363,58.42 r180 bottom value=10k
R46 "" J1-0603 24.601,92.074 r90 top value=10k
R47 "" J1-0603 18.42,92.074 r90 top value=10k
R48 "" J1-0603 22.541,92.074 r90 top value=10k
R49 "" J1-0603 14.3,92.074 r90 top value=10k
R50 "Res3" J1-0603 17.443,42.345 r90 top value=0
R51 "Res3" J1-0603 6.769,11.811 r0 top value=51K
R52 "Res3" J1-0603 18.996,37.681 r180 top value=0
R53 "Res3" J1-0603 13.208,51.489 r90 top value=10K
R54 "Res3" J1-0603 6.769,9.779 r180 top value=1K2
R55 "Res3" J1-0603 40.163,51.489 r90 top value=2K2
R56 "Res3" J1-0603 38.087,51.489 r90 top value=2K2
R57 "Res3" J1-0603 36.01,51.489 r90 top value=10K
R58 "Res3" J1-0603 4.414,51.421 r270 top value=10K
R59 "Res3" J1-0603 15.246,51.489 r90 top value=1M
R60 "Res3" J1-0603 17.323,51.489 r90 top value=1M
R61 "Res3" J1-0603 23.552,51.489 r270 top value=0
R62 "Res3" J1-0603 21.475,51.489 r270 top value=0
R63 "Res3" J1-0603 25.628,51.489 r270 top value=1M
R64 "Res3" J1-0603 19.399,51.489 r270 top value=1M
R65 "Res3" J1-0603 29.781,51.489 r90 top value=100K
R66 "Res3" J1-0603 31.857,51.489 r90 top value=100K
R67 "Res3" J1-0603 27.705,51.489 r270 top value=100K
R68 "Res3" J1-0603 33.934,51.489 r270 top value=100K
R69 "Res3" J1-0603 65.906,10.129 r0 top value=300K
R70 "Res3" J1-0603 65.906,8.097 r180 top value=100K
R71 "Res3" J1-0603 65.906,4.112 r180 top value=100K
R72 "Res3" J1-0603 65.906,6.105 r180 top value=150K
R73 "Res3" J1-0603 22.781,75.691 r180 bottom value=0
R74 "Res3" J1-0603 68.326,87.503 r0 top value=10K
R75 "Res3" J1-0603 68.326,81.305 r180 top value=100K
R76 "Res3" J1-0603 133.096,69.723 r270 top value=10K
R77 "Res3" J1-0603 79.629,83.608 r180 top value=10
R78 "Res3" J1-0603 79.629,81.534 r0 top value=2K
R79 "Res3" J1-0603 68.326,85.437 r180 top value=68K
R80 "Res3" J1-0603 68.326,83.371 r180 top value=10K
R81 "Res3" J1-0603 68.326,79.197 r0 top value=1K
R82 "Res3" J1-0603 79.629,77.301 r0 top value=2K
R83 "Res3" J1-0603 68.326,77.089 r180 top value=10K
R84 "Res3" J1-0603 79.629,85.81 r180 top value=100
R85 "Res3" J1-0603 79.629,87.884 r180 top value=100
R86 "Res3" RESC6332 112.649,44.958 r90 top value=2m
R87 "Res3" J1-0603 78.613,58.801 r90 top value=100
R88 "Res3" RESC6332 74.168,50.157 r0 top value=8m
R89 "Res3" RESC6332 74.168,45.839 r0 top value=8m
R90 "Res3" RESC6332 74.168,41.521 r0 top value=8m
R91 "Res3" RESC6332 74.168,37.076 r0 top value=8m
R92 "Res3" J1-0603 79.629,79.417 r180 top value=100
R93 "Res3" J1-0603 100.838,96.88 r90 top value=160K
R94 "Res3" RESC6332 109.453,8.458 r0 top value=2m
R95 "Res3" J1-0603 107.251,13.568 r0 top value=1K3
R96 "Res3" J1-0603 98.425,96.868 r270 top value=10K
SW1 "DTSM-62Y-V-T/R" DTSM-62_DIP 60.96,91.694 r270 top
SW2 "DTSM-62Y-V-T/R" DTSM-62_DIP 53.594,91.821 r270 top
U1 "STM32F373CCT6" STM-LQFP48_M 22.019,78.358 r0 top
U2 "TPD4S480RUKR" RUK0020B-IPC_A 21.463,44.958 r0 top
U3 "LM74502DDFR" DDF0008A-IPC_A 22.352,25.908 r90 top
U4 "TPS26750SRSMR" VQFN32_RSM_TEX 28.829,39.116 r90 top
U5 "LM5166DRCR" FP-DRC0010J-MFG 52.702,9.287 r0 top
U6 "TLV70233DBVT" DBV0005A_M 87.327,6.792 r0 top
U7 "LM5176PWPR" FP-PWP0028C-IPC_C 73.66,66.548 r0 top
U8 "LM358LVIDR" FP-D0008A-IPC_A 74.676,93.472 r0 top
U9 "INA826SIDRCR" DRC10_TEX 106.413,18.542 r90 top

## Footprints (in the part's own frame and the unit in brackets; to place one, negate y for a bottom-side part, rotate by r counter-clockwise, add the part's x,y. Pads: shape width x height; smd on the part's side, far side on the other; paste and mask are expansions set on the pad)
3.2X1.6X1.1 [mm] "SMT LED; 2 Flat Leads"
  rect 1.5x1.5 smd: 1(-1.75,0) 2(1.75,0)
  silkscreen extent -2.9,-1.15 3.2,1.15
0402 [mm] "Chip Capacitor, Body 1.0x0.5mm, IPC High Density"
  rect 0.6x0.5 smd: 1(-0.5,0) 2(0.5,0)
  body extent -0.55,-0.3 0.55,0.3, height 1.3
1608[0603] [mm] "Chip Capacitor, Body 1.6x0.8mm, IPC High Density"
  rect 0.8x0.9 smd: 1(-0.7,0) 2(0.7,0)
  body extent -0.87,-0.48 0.87,0.48, height 1.3
74650094 [mm] "REDCUBE THR with internal thread, M4x3mm, through"
  round 3.2 hole 1.85: 1(-4.435,-4.435) 1(-4.435,0) 1(-4.435,4.435) 1(0,-4.435) 1(0,4.435) 1(4.435,-4.435) 1(4.435,0) 1(4.435,4.435)
  round 4.2 hole 4.2 unplated: MH1(0,0)
  silkscreen extent -5,-5 5,5, body extent -5,-5 5,5, height 3.5
744711003 [mm]
  round 4 hole 2.5: 1(0,0) 2(32.004,0)
  silkscreen extent -2.5,-11.24 34.5,0.51
C1206 [mm] "Chip Capacitor, Body 3.2x1.6mm, IPC High Density"
  rect 1.1x1.7 smd: 1(-1.35,0) 2(1.35,0)
  silkscreen extent -0.4,-0.75 0.4,0.75, body extent -1.7,-0.9 1.7,0.9, height 1.3
CAP_EEU-FR2A101B_PAN [mil]
  rect 56x56 hole 36 paste-99999 mask+0: 1(0,0)
  round 56 hole 36 paste-99999 mask+0: 2(196.85,0)
  silkscreen extent -168,-212 310,212, body extent -108,-207 306,207, height 867
DBV0005A_M [mm] "SOT23, 5-Leads, Body 3.05x1.75mm, Pitch 0.95mm, IPC Low Density"
  rrect15% 1.2x0.65 smd: 1(-1.475,0.95) 2(-1.475,0) 3(-1.475,-0.95) 4(1.475,-0.95) 5(1.475,0.95)
  silkscreen extent -1.6,-1.55 0.5,1.95, body extent -1.42,-1.46 1.42,1.46, height 1.08
DDF0008A-IPC_A [mm]
  rect 1.757x0.5 smd paste+0 mask+0: 1(-1.151,0.975) 2(-1.151,0.325) 3(-1.151,-0.325) 4(-1.151,-0.975) 5(1.151,-0.975) 6(1.151,-0.325) 7(1.151,0.325) 8(1.151,0.975)
  silkscreen extent -2.73,-1.7 1.4,1.7, body extent -1.41,-1.45 1.41,1.45, height 0.9
DRC10_TEX [mil]
  rect 32x10 smd paste+0 mask+0: 1(-57,39.37) 2(-57,19.69) 3(-57,0) 4(-57,-19.69) 5(-57,-39.37) 6(57,-39.37) 7(57,-19.69) 8(57,0) 9(57,19.69) 10(57,39.37)
  rect 65x95 smd paste-47 mask-47: 11(0,0)
  round 29.53 hole 11.81 paste-99999 mask-20: V(-15.5,31) V(-15.5,0) V(-15.5,-31) V(15.5,31) V(15.5,0) V(15.5,-31)
  silkscreen extent -90,-66 66,66, body extent -61,-61 61,61, height 40
DTSM-62_DIP [mm]
  rect 1.549x1.295 smd paste+0 mask+0: 1(-3.975,2.25) 2(3.975,2.25) 3(-3.975,-2.25) 4(3.975,-2.25)
  silkscreen extent -7.33,-3.23 3.23,3.23, body extent -4.4,-3.1 4.4,3.1, height 5.01
FP-D0008A-IPC_A [mm]
  rect 2.469x0.622 smd paste+0 mask+0: 1(-2.414,1.905)
  rrect100% 2.469x0.622 smd paste+0 mask+0: 2(-2.414,0.635) 3(-2.414,-0.635) 4(-2.414,-1.905) 5(2.414,-1.905) 6(2.414,-0.635) 7(2.414,0.635) 8(2.414,1.905)
  silkscreen extent -4.32,-2.45 0.68,2.45, body extent -4.15,-2.95 4.15,2.95, height 0.25
FP-DRC0010J-MFG [mm]
  rrect42% 0.6x0.24 smd paste+0 mask+0: 1(-1.4,1) 2(-1.4,0.5) 3(-1.4,0) 4(-1.4,-0.5) 5(-1.4,-1) 6(1.4,-1) 7(1.4,-0.5) 8(1.4,0) 9(1.4,0.5) 10(1.4,1)
  round 1.485 smd paste-1000 mask+0: 11(0,0)
  Top Layer region: -0.825,-1.15 -0.818,-1.175 -0.8,-1.193 -0.775,-1.2 -0.775,-1.2 -0.375,-1.2 -0.375,-1.65 -0.368,-1.675 -0.35,-1.693 -0.325,-1.7 -0.325,-1.7 -0.175,-1.7 -0.156,-1.696 -0.14,-1.685 -0.129,-1.669 -0.125,-1.65 -0.125,-1.65 -0.125,-1.2 0.125,-1.2 0.125,-1.65 0.129,-1.669 0.14,-1.685 0.156,-1.696 0.175,-1.7 0.175,-1.7 0.325,-1.7 0.35,-1.693 0.368,-1.675 0.375,-1.65 0.375,-1.65 0.375,-1.2 0.775,-1.2 0.8,-1.193 0.818,-1.175 0.825,-1.15 0.825,-1.15 0.825,1.15 0.818,1.175 0.8,1.193 0.775,1.2 0.775,1.2 0.375,1.2 0.375,1.65 0.368,1.675 0.35,1.693 0.325,1.7 0.325,1.7 0.175,1.7 0.156,1.696 0.14,1.685 0.129,1.669 0.125,1.65 0.125,1.65 0.125,1.2 -0.125,1.2 -0.125,1.65 -0.129,1.669 -0.14,1.685 -0.156,1.696 -0.175,1.7 -0.175,1.7 -0.325,1.7 -0.35,1.693 -0.368,1.675 -0.375,1.65 -0.375,1.65 -0.375,1.2 -0.775,1.2 -0.8,1.193 -0.818,1.175 -0.825,1.15 -0.825,1.15 -0.825,1.15
  silkscreen extent -2.5,-1.55 1.55,1.55, body extent -1.8,-1.8 1.8,1.8, height 0.25
FP-EEU-FR1J470-MFG [mm]
  rect 1.2x1.2 hole 0.7 paste-2539.97 mask+0: 1(-1.25,0)
  round 1.2 hole 0.7 paste-2539.97 mask+0: 2(1.25,0)
  silkscreen extent -3.4,-3.4 3.4,3.4, body extent -3.5,-3.5 3.5,3.5, height 0.25
FP-PG-TO220-3-MFG [mm]
  rect 1.85x1.85 hole 1.2 paste-2539.97 mask+0: 1(-0.705,2.54)
  round 1.85 hole 1.2 paste-2539.97 mask+0: 2(-0.705,0) 3(-0.705,-2.54)
  silkscreen extent -2.27,-5.2 2.27,6.1, body extent -2.37,-5.55 2.37,5.55, height 0.25
FP-PWP0028C-IPC_C [mm]
  rect 1.355x0.341 smd paste+0 mask+0: 1(-2.775,4.225)
  rrect100% 1.355x0.341 smd paste+0 mask+0: 2(-2.775,3.575) 3(-2.775,2.925) 4(-2.775,2.275) 5(-2.775,1.625) 6(-2.775,0.975) 7(-2.775,0.325) 8(-2.775,-0.325) 9(-2.775,-0.975) 10(-2.775,-1.625) 11(-2.775,-2.275) 12(-2.775,-2.925) 13(-2.775,-3.575) 14(-2.775,-4.225) 15(2.775,-4.225) 16(2.775,-3.575) 17(2.775,-2.925) 18(2.775,-2.275) 19(2.775,-1.625) 20(2.775,-0.975) 21(2.775,-0.325) 22(2.775,0.325) 23(2.775,0.975) 24(2.775,1.625) 25(2.775,2.275) 26(2.775,2.925) 27(2.775,3.575) 28(2.775,4.225)
  rect 3.1x5.18 smd paste-1000 mask+0: 29(0,0)
  silkscreen extent -4.15,-4.85 2.2,4.85, body extent -3.55,-4.95 3.55,4.95, height 0.25
FP-RAD-TH-D_12_5_0_5-L_25-MFG [mm]
  rect 1.3x1.3 hole 0.8 paste-2539.97 mask+0: 1(-2.5,0)
  round 1.3 hole 0.8 paste-2539.97 mask+0: 2(2.5,0)
  silkscreen extent -6.5,-6.5 6.5,6.5, body extent -6.6,-6.6 6.6,6.6, height 0.25
FP-SOT23-IPC_A [mm]
  rect 1.655x0.602 smd paste+0 mask+0: 1(-0.975,0.95)
  rrect100% 1.655x0.602 smd paste+0 mask+0: 2(-0.975,-0.95) 3(0.975,0)
  silkscreen extent -0.65,-1.45 0.65,1.45, body extent -2.3,-1.95 2.3,1.95, height 0.25
FP-SOT523-IPC_A [mm]
  rect 1.557x0.416 smd paste+0 mask+0: 1(-0.651,0.5)
  rrect100% 1.557x0.416 smd paste+0 mask+0: 2(-0.651,-0.5) 3(0.651,0)
  silkscreen extent -0.8,-1.05 0.8,1.05, body extent -1.93,-1.3 1.93,1.3, height 0.25
HDR1X4 [mm] "Connector; Header; 4 Position"
  rect 1.5x1.5 hole 0.9: 1(0,0)
  round 1.5 hole 0.9: 2(2.54,0) 3(5.08,0) 4(7.62,0)
  silkscreen extent -1.27,-1.27 8.89,1.27
HDR1X5 [mm] "Connector; Header; 5 Position"
  rect 1.5x1.5 hole 0.9: 1(0,0)
  round 1.5 hole 0.9: 2(2.54,0) 3(5.08,0) 4(7.62,0) 5(10.16,0)
  silkscreen extent -1.27,-1.27 11.43,1.27
HDR1X10 [mm] "Connector; Header; 10 Position"
  rect 1.5x1.5 hole 0.9: 1(0,0)
  round 1.5 hole 0.9: 2(2.54,0) 3(5.08,0) 4(7.62,0) 5(10.16,0) 6(12.7,0) 7(15.24,0) 8(17.78,0) 9(20.32,0) 10(22.86,0)
  silkscreen extent -1.27,-1.27 24.13,1.27
IND_DE1205_FRC [mil]
  rect 110x213 smd paste+0 mask+0: 1(-192.91,0) 2(192.91,0)
  Top Layer keep-out region: -125,-120 -125,120 125,120 125,-120
  Top Layer keep-out region: -240,120 -240,240 240,240 240,120
  Top Layer keep-out region: -240,-240 -240,-120 240,-120 240,-240
  silkscreen extent -247,-247 247,247, body extent -303,-242 303,242, height 238
IND_PCC-M1054M_PAN [mil]
  rect 105x177 smd paste+0 mask+0: 1(-174,0) 2(174,0)
  silkscreen extent -226,-210 226,210, body extent -221,-204 221,204, height 213
J1-0603 [mm] "Chip Resistor, Body 1.6x0.8mm, IPC High Density"
  rect 0.7x0.9 smd: 1(-0.75,0) 2(0.75,0)
  silkscreen extent -0.2,-0.35 0.2,0.35, body extent -0.85,-0.48 0.85,0.48, height 0.9
POWERPAK_SO-8_SINGLE_VIS [mil]
  rect 40x18 smd paste+0 mask+0: 1(-115,75) 2(-115,25) 3(-115,-25) 4(-115,-75) 5(115,-75) 6(115,-25) 7(115,25) 8(115,75)
  Top Layer region: 95,-77 95,77 -56,77 -56,-77
  silkscreen extent -167,-104 123,104, body extent -123,-99 123,99, height 44
RESC6332 [mm] "Chip Resistor, Body 6.3x3.2mm, IPC High Density"
  rect 1.1x3.3 smd: 1(-2.85,0) 2(2.85,0)
  silkscreen extent -1.9,-1.55 1.9,1.55, body extent -3.22,-1.68 3.22,1.68, height 0.9
RUK0020B-IPC_A [mm]
  rect 0.931x0.192 smd paste+0 mask+0: 1(-1.491,0.8) 2(-1.491,0.4) 3(-1.491,0) 4(-1.491,-0.4) 5(-1.491,-0.8) 11(1.491,-0.8) 12(1.491,-0.4) 13(1.491,0) 14(1.491,0.4) 15(1.491,0.8)
  rect 0.192x0.931 smd paste+0 mask+0: 6(-0.8,-1.491) 7(-0.4,-1.491) 8(0,-1.491) 9(0.4,-1.491) 10(0.8,-1.491) 16(0.8,1.491) 17(0.4,1.491) 18(0,1.491) 19(-0.4,1.491) 20(-0.8,1.491)
  rect 1.75x1.75 smd paste-0.862 mask+0: 21(0,0)
  silkscreen extent -2.83,-1.5 1.5,1.5, body extent -1.5,-1.5 1.5,1.5, height 0.8
SMB [mm] "DO-214-AA/SMB; 2 C-Bend Leads; Body 5.3 x 3.6 mm, inc. leads (LxW)"
  rect 2.3x2.3 smd: 1(-2.25,0) 2(2.25,0)
  silkscreen extent -3.8,-1.55 4.1,1.55
SOT523_DMN2004_DIO [mil]
  rect 14.36x39.56 smd paste+0 mask+0: 1(-19.68,-28.5) 2(19.69,-28.5) 3(0,28.5)
  silkscreen extent -88,-39 38,22, body extent -34,-34 34,34, height 35
SOT-23_TO-236_VIS [mil]
  rect 22x52 smd paste+0 mask+0: 1(-37.4,-40) 2(37.4,-40) 3(0,40)
  silkscreen extent -62,-99 62,31, body extent -57,-52 57,52, height 44
STM-LQFP48_M [mm] "QFP, 48-Leads, Body 7x7mm, Pitch 0.5mm, IPC Low Density"
  oval 2.1x0.3 smd: 1(-4.1,2.75) 2(-4.1,2.25) 3(-4.1,1.75) 4(-4.1,1.25) 5(-4.1,0.75) 6(-4.1,0.25) 7(-4.1,-0.25) 8(-4.1,-0.75) 9(-4.1,-1.25) 10(-4.1,-1.75) 11(-4.1,-2.25) 12(-4.1,-2.75) 25(4.1,-2.75) 26(4.1,-2.25) 27(4.1,-1.75) 28(4.1,-1.25) 29(4.1,-0.75) 30(4.1,-0.25) 31(4.1,0.25) 32(4.1,0.75) 33(4.1,1.25) 34(4.1,1.75) 35(4.1,2.25) 36(4.1,2.75)
  oval 0.3x2.1 smd: 13(-2.75,-4.1) 14(-2.25,-4.1) 15(-1.75,-4.1) 16(-1.25,-4.1) 17(-0.75,-4.1) 18(-0.25,-4.1) 19(0.25,-4.1) 20(0.75,-4.1) 21(1.25,-4.1) 22(1.75,-4.1) 23(2.25,-4.1) 24(2.75,-4.1) 37(2.75,4.1) 38(2.25,4.1) 39(1.75,4.1) 40(1.25,4.1) 41(0.75,4.1) 42(0.25,4.1) 43(-0.25,4.1) 44(-0.75,4.1) 45(-1.25,4.1) 46(-1.75,4.1) 47(-2.25,4.1) 48(-2.75,4.1)
  silkscreen extent -4.22,-2.65 2.65,3.57, body extent -3.5,-3.5 3.5,3.5, height 1.6
TRIM_503KT20_VIS [mil]
  round 40 hole 20 paste-99999 mask-20: 1(0,0) 2(100,0) 3(200,0)
  silkscreen extent -96,-104 296,104, body extent -88,-91 290,91, height 242
UJ32CHGSMTTR [mm]
  round 0.575 hole 1.15 unplated: 2(3.725,2.671)
  round 1.815 hole 1.21: 3(-4.5,4.171) 4(4.5,4.171)
  round 0.325 hole 0.65 unplated: 3(-3.725,2.671)
  round 2.085 hole 1.39: 5(-4.5,-1.429) 6(4.5,-1.429)
  rect 0.35x0.7 smd: A1(-2.75,4.481) A2(-2.25,4.481) A3(-1.75,4.481) A4(-1.25,4.481) A5(-0.75,4.481) A6(-0.25,4.481) A7(0.25,4.481) A8(0.75,4.481) A9(1.25,4.481) A10(1.75,4.481) A11(2.25,4.481) A12(2.75,4.481)
  round 0.65 hole 0.4: B1(3.05,3.371) B2(2.4,2.671) B3(1.6,2.671) B4(1.2,3.371) B5(0.8,2.671) B6(0.4,3.371) B7(-0.4,3.371) B8(-0.8,2.671) B9(-1.2,3.371) B10(-1.6,2.671) B11(-2.4,2.671) B12(-3.05,3.371)
  silkscreen extent -4.82,-5.08 4.82,5.5, body extent -4.82,-5.08 4.83,4.92, height 3.52
VQFN32_RSM_TEX [mm]
  rect 0.757x0.204 smd paste+0 mask+0: 1(-1.966,1.4) 2(-1.966,1) 3(-1.966,0.6) 4(-1.966,0.2) 5(-1.966,-0.2) 6(-1.966,-0.6) 7(-1.966,-1) 8(-1.966,-1.4) 17(1.966,-1.4) 18(1.966,-1) 19(1.966,-0.6) 20(1.966,-0.2) 21(1.966,0.2) 22(1.966,0.6) 23(1.966,1) 24(1.966,1.4)
  rect 0.204x0.757 smd paste+0 mask+0: 9(-1.4,-1.966) 10(-1,-1.966) 11(-0.6,-1.966) 12(-0.2,-1.966) 13(0.2,-1.966) 14(0.6,-1.966) 15(1,-1.966) 16(1.4,-1.966) 25(1.4,1.966) 26(1,1.966) 27(0.6,1.966) 28(0.2,1.966) 29(-0.2,1.966) 30(-0.6,1.966) 31(-1,1.966) 32(-1.4,1.966)
  rect 2.845x2.845 smd paste-1.422 mask+0: 33(0,0)
  silkscreen extent -2.17,-2.85 2.85,2.85, body extent -2.04,-2.04 2.04,2.04, height 0.99

## Part data
C1 C2 C3 C4 C5 C6 C12 C13 C14 C17 C19 C21 C23 C26 C27 C28 C29 C31 C32 C33 C34 C35 C36 C37 C38 C39 C40 C50: "Capacitor (Semiconductor SIM Model)", LatestRevisionDate=29-May-2009, LatestRevisionNote="IPC-7351 Footprint Added.", PackageDescription="Chip Capacitor", PackageReference=C1206, Published=8-Jun-2000, Publisher="Altium Limited"
  C12 C13 C14 C17 C19 C21 C23 C26 C27 C28 C29 C32 C33 C34 C35 C36 C37 C38 C39 C40 C50: Simulation ModelName=CAP, Simulation PortMap=(1:1),(2:2)
C7 L2: "No Description Available", Manufacturer_Name=Panasonic, Copyright="Copyright (C) 2025 Ultra Librarian. All rights reserved."
  C7: Manufacturer_Part_Number=EEU-FR2A101B
  L2: Manufacturer_Part_Number=ETQ-P5M1R5YFC
C8 C15 C16 C18 C20 C22 C24 C25 C41 C42 C43 C44 C45 C48 C49: library part CMP-05427-000066-1, "CAP ALUM 47UF 20% 63V RADIAL", Capacitance=47uF, Case/Package=Radial, ESR (Equivalent Series Resistance)=210mR, Max Operating Temperature=105°C, Min Operating Temperature=-40°C, Package Quantity=200, Ripple Current=284mA, Tolerance=20%, Voltage=63V, Construction=Cylindrical, Contact Plating=Tin, Diameter=6.3mm, Height=11.2mm, Height - Seated (Max)=0.5inch, Impedance=210mR, Lead Diameter=0.5mm, Lead Free="Lead Free", Lead Pitch=2.5mm, Length=11.2mm, Life (Hours)=5000Hour, Mount="Through Hole", Packaging=Bulk, Radiation Hardening=No, REACH SVHC="No SVHC", Ripple Current (AC)=284mA, RoHS Compliant=Yes, Series=FR, Termination=Radial, Voltage Rating=63V, Voltage Rating (DC)=63V
C9 C10 C11 C30 C51: library part "Cap Semi", "Capacitor (Semiconductor SIM Model)", LatestRevisionDate=29-May-2009, LatestRevisionNote="IPC-7351 Footprint Added.", PackageDescription="Chip Capacitor", PackageReference=C1206, Published=8-Jun-2000, Publisher="Altium Limited", Simulation ModelName=CAP, Simulation PortMap=(1:1),(2:2)
C46 C47: library part CMP-05427-000281-1, "Aluminum Electrolytic Capacitors (Radial Lead Type) 470uF ±20% 63V", Capacitance=470uF, Case/Package=Radial, ESR (Equivalent Series Resistance)=27mR, Max Operating Temperature=105°C, Min Operating Temperature=-40°C, Package Quantity=100, Ripple Current=1.995A, Tolerance=20%, Voltage=63V, Construction=Cylindrical, Contact Plating=Tin, Diameter=12.5mm, Height=25mm, Height - Seated (Max)=1.063inch, Impedance=27mR, Lead Diameter=0.6mm, Lead Free="Lead Free", Lead Pitch=5mm, Length=25mm, Life (Hours)=10000Hour, Mount="Through Hole", Packaging=Bulk, Radiation Hardening=No, Ripple Current (AC)=1.995A, RoHS Compliant=Yes, Series=FR, Termination=Radial, Voltage Rating=63V, Voltage Rating (DC)=63V
D1 D2: library part LED2, "Typical RED, GREEN, YELLOW, AMBER GaAs LED", LatestRevisionDate=17-Jul-2002, LatestRevisionNote="Re-released for DXP Platform.", PackageDescription="SM LED; 2 Flat Leads", PackageReference=3.2X1.6X1.1, PackageVersion=Feb-2002, Published=8-Jun-2000, Publisher="Altium Limited", Simulation ModelName=LED2, Simulation PortMap=(1:1),(2:2)
D3 D4 D5: "Schottky Diode", Code_JEDEC=DO-214-AA, LatestRevisionDate=17-Jul-2002, LatestRevisionNote="Re-released for DXP Platform.", PackageDescription="DO-214-AA/SMB; 2 C-Bend Leads; Body 5.3 x 3.6 mm, inc. leads (LxW)", PackageReference=SMB, Published=8-Jun-2000, Publisher="Altium Limited", Simulation ModelName=SKYDIODE, Simulation PortMap=(1:1),(2:2)
J1: "UJ32-C-H-G-SMT-TR - Type C, USB 3.2 Gen 2x2, 20 Gbps, 20 Vac, 5 A, Right Angle, Gold Flash, Surface Mount, Black Insulator, USB Receptacle", Manufacturer_Name="Same Sky", Mouser Part Number=179-UJ32CHGSMTTR, Datasheet Link=https://www.sameskydevices.com/product/resource/UJ32-C-H-G-SMT-TR.pdf, Geometry.Height=3.71mm, Manufacturer_Part_Number=UJ32-C-H-G-SMT-TR, Mouser Price/Stock=https://www.mouser.co.uk/ProductDetail/CUI-Devices/UJ32-C-H-G-SMT-TR?qs=vvQtp7zwQdNJg60%252BwYKIHw%3D%3D
L1: "Description", Manufacturer_Name=FerroCore, Copyright="Copyright (C) 2025 Ultra Librarian. All rights reserved.", Manufacturer_Part_Number=DE1205-560
MP1 MP2: library part CMP-03913-89699612-2, "WP-THRBU REDCUBE Bush, THR_open", Current Rating=85A, Max Operating Temperature=150°C, Min Operating Temperature=-55°C, Height=3mm, Material=Brass, Number of Pins=8, Packaging=Bulk, RoHS=Compliant, Width=10mm
P1: library part "Header 5", "Header, 5-Pin", LatestRevisionDate=17-Jul-2002, LatestRevisionNote="Re-released for DXP Platform.", Publisher="Altium Limited"
P2 P5 P6: library part "Header 4", "Header, 4-Pin", LatestRevisionDate=17-Jul-2002, LatestRevisionNote="Re-released for DXP Platform.", Publisher="Altium Limited"
P3 P7: "Header, 5-Pin", LatestRevisionDate=17-Jul-2002, LatestRevisionNote="Re-released for DXP Platform.", Publisher="Altium Limited"
P4: "Header, 10-Pin", LatestRevisionDate=17-Jul-2002, LatestRevisionNote="Re-released for DXP Platform.", Publisher="Altium Limited"
Q1 Q2 Q3: "N-CHANNEL 60-V (D-S) MOSFET", Manufacturer_Name=Vishay, Copyright="Copyright (C) 2025 Ultra Librarian. All rights reserved."
  Q1: Manufacturer_Part_Number=SI2308CDS-T1-GE3
  Q2 Q3: Manufacturer_Part_Number=SIR4608DP-T1-GE3, RefDes=RefDes, Type=Type
Q4 Q5: library part CMP-12801-000011-2, "MOSFET P-CH 20V 0.46A SOT-523", Case/Package=SOT-523, Continuous Drain Current (ID)=460mA, Drain to Source Breakdown Voltage=-20V, Drain to Source Resistance=1R, Drain to Source Voltage (Vdss)=20V, Gate to Source Voltage (Vgs)=6V, Input Capacitance=59.76pF, Max Operating Temperature=150°C, Max Power Dissipation=270mW, Min Operating Temperature=-55°C, On-State Resistance=700mR, Package Quantity=1, Threshold Voltage=-1V, Contact Plating=Tin, Element Configuration=Single, Fall Time=20.7ns, Height=0.8mm, Lead Free="Lead Free", Length=1.7mm, Mount="Surface Mount", Number of Channels=1, Number Of Elements=1, Number of Pins=3, Packaging="Tape and Reel", Power Dissipation=270mW, Radiation Hardening=No, Rds On Max=700mR, REACH SVHC="No SVHC", Rise Time=8.1ns, Turn-Off Delay Time=28.4ns, Turn-On Delay Time=5.1ns, Weight=7.1E-05oz, Width=0.85mm
Q6 Q7: "Description", Manufacturer_Name="Diodes Inc", Copyright="Copyright (C) 2025 Ultra Librarian. All rights reserved.", Manufacturer_Part_Number=DMN2004TK-7
Q8: library part CMP-14406-000010-1, "TRANS NPN 65V 0.1A SOT23", Ambient Temperature Range High=+150°C, Ambient Temperature Range Low=-65°C, Collector Base Voltage=80V, Collector Emitter Saturation Voltage=200mV, Collector Emitter Voltage=65V, Emitter Base Voltage=6V, Manufacturer=Nexperia, Max Collector Current=100mA, Package=SOT23, Power Dissipation=250mW, Temperature="to +150°C", Unity Gain Freq=100MHz, Automotive=Yes, Automotive Grade="Grade 0", Category=Trans, ComponentLink2Description=Datasheet, ComponentLink2URL=https://assets.nexperia.com/documents/data-sheet/BC846_SER.pdf, Device Class L1="Discrete Semiconductors", Device Class L2=Transistors, Device Class L3=BJTs, Digikey Description="TRANS NPN 65V 0.1A SOT23", Footprint Url=https://assets.nexperia.com/documents/outline-drawing/SOT23.pdf, Height=1.1mm, Hfe Max=450, Hfe Min=110, Hfe Testic=2mA, Hfe Testvce=5V, Lead Free=Yes, Manufacturer Part Number=BC846A,215, Max Junction Temp=+150°C, Mouser Description="BC846 Series 65 V 100 mA NPN SMT General Purpose Transistor - SOT-23", Number Of Elements=1, Number Of Npn=1, Octopart=https://octopart.com/bc846a%2C215-nexperia-78739089, RoHS=TRUE, Rthja Max=500K/W, Temperature Range High=+150°C
Q9: "T93 YA 50K 10% TU50 e3", Manufacturer_Name=Vishay, Copyright="Copyright (C) 2025 Ultra Librarian. All rights reserved.", Datasheet=https://www.vishay.com/doc?51026, Manufacturer_Part_Number=T93YA503KT20, Type="Trimmer Potentiometers"
Q10 Q11 Q12 Q13: library part CMP-32901-001056-1, "MOSFET N-CH 55V 75A TO220AB", Case/Package=TO-220, Continuous Drain Current (ID)=75A, Drain to Source Breakdown Voltage=55V, Drain to Source Resistance=4.7mR, Gate to Source Voltage (Vgs)=20V, Input Capacitance=5.11nF, Max Operating Temperature=175°C, Max Power Dissipation=330W, Min Operating Temperature=-55°C, Threshold Voltage=4V, Drain to Source Voltage (Vdss)=55V, Element Configuration=Single, Halogen Free="Halogen Free", Height=0.65inch, Lead Free="Lead Free", Length=0.42inch, Max Dual Supply Voltage=55V, Mount="Through Hole", Number of Pins=3, Packaging=Rail/Tube, Polarization=N, Power Dissipation=330W, Rds On Max=4.7mR, REACH SVHC="No SVHC", RoHS Compliant=Yes, Series=HEXFET®, Turn-Off Delay Time=68ns, Turn-On Delay Time=14ns, Width=0.19inch
R1 R2 R3 R4 R5 R6 R7 R8 R9 R10 R11 R12 R13 R15 R17 R18 R19 R20 R21 R22 R23 R24 R25 R26 R27 R28 R29 R30 R31 R32 R33 R34 R35 R36 R37 R38 R39 R40 R41 R42 R43 R44 R45 R46 R47 R48 R49: library part Res3, "Resistor", LatestRevisionDate=29-May-2009, LatestRevisionNote="IPC-7351 Footprint Added.", PackageDescription="Chip Resistor", PackageReference=J1-0603, Published=8-Jun-2000, Publisher="Altium Limited"
  R1 R2 R3 R4 R5 R6 R7 R8 R9 R10 R11 R12 R15 R17 R18 R20 R21 R22 R23 R24 R25 R26 R27 R28 R29 R30 R31 R33 R34 R35 R36 R37 R38 R39: Simulation ModelName=RESISTOR, Simulation PortMap=(1:1),(2:2)
R14 R16 R50 R51 R52 R53 R54 R55 R56 R57 R58 R59 R60 R61 R62 R63 R64 R65 R66 R67 R68 R69 R70 R71 R72 R73 R74 R75 R76 R77 R78 R79 R80 R81 R82 R83 R84 R85 R86 R87 R88 R89 R90 R91 R92 R93 R94 R95 R96: "Resistor", LatestRevisionDate=29-May-2009, LatestRevisionNote="IPC-7351 Footprint Added.", PackageDescription="Chip Resistor", PackageReference=J1-0603, Published=8-Jun-2000, Publisher="Altium Limited", Simulation ModelName=RESISTOR, Simulation PortMap=(1:1),(2:2)
SW1 SW2: library part DTSM-62Y-V-TR, "Description", Manufacturer_Name=Diptronics, Copyright="Copyright (C) 2025 Ultra Librarian. All rights reserved.", Manufacturer_Part_Number=DTSM-62Y-V-T/R, RefDes=RefDes, Type=Type
U1: library part CMP-0572-00021-2, "ARM Cortex-M4 32-bit MCU, 256 KB Flash, 32 KB Internal RAM, 36 I/Os, 48-pin LQFP, -40 to 85 degC, Tray", I/Os (High Current)=36, Operating Frequency(F) (Processor speed) (MHz)=72, Supply Voltage(Vcc) min (V)=2, ComponentLink1Description="Manufacturer URL", ComponentLink1URL=http://www.st.com/web/en/home.html, ComponentLink2Description=Datasheet, ComponentLink2URL=http://www.st.com/st-web-ui/static/active/en/resource/technical/document/datasheet/DM00046749.pdf, ComponentLink3Description="Package Specification", ComponentLink3URL=http://www.st.com/st-web-ui/static/active/en/resource/technical/document/datasheet/DM00058181.pdf, Core="ARM Cortex-M4", DatasheetVersion="Rev. 3", FLASH Size (Prog) (kB)=256, Internal RAM Size (kB)=32, Mounting Technology="Surface Mount", PackageDescription="48-Pin Low Profile Quad Flat Package, 7 x 7 mm Body, 0.5 mm Pitch", PackageReference=LQFP48, PackageVersion="Rev. 6, 06/2013", Packing=Tray, PartNumber=STM32F373CCT6
U2: "USB Type-Câ„¢ 48V EPR port protector with short-to-VBUS overvoltage and IEC ESD protection 20-WQFN -40 to 125", Manufacturer_Name="Texas Instruments", Copyright="Copyright (C) 2025 Ultra Librarian. All rights reserved.", Manufacturer_Part_Number=TPD4S480RUKR, RefDes=RefDes, Type=TYPE
U3: "3.2-V to 65-V industrial RPP controller with load disconnect and OVP 8-SOT-23-THIN -40 to 125", Manufacturer_Name="Texas Instruments", Copyright="Copyright (C) 2025 Ultra Librarian. All rights reserved.", Manufacturer_Part_Number=LM74502DDFR, RefDes=RefDes, Type=TYPE
U4: "USB Type-CÂ® and USB Power Delivery (PD) 3.1 controller with 240-W extended power range support  32-VQFN -40 to 125", Manufacturer_Name="Texas Instruments", Copyright="Copyright (C) 2025 Ultra Librarian. All rights reserved.", Manufacturer_Part_Number=TPS26750SRSMR, RefDes=RefDes, Type=Type
U5: library part CMP-04918-000087-1, "IC REG BUCK ADJ 500MA 10VSON", Manufacturer="Texas Instruments", Max Junction Temp=+150°C, Max Supply Voltage=65V, Min Supply Voltage=3V, Nominal Supply Current=205-320uA, Output Current=500mA, Output Voltage=1.23-65V, Package=DRC0010J, Switching Frequency=50-600kHz, Temperature="-40°C to +150°C", Temperature Range Low=-40°C, Automotive=No, Category=IC, ComponentLink2Description=Datasheet, ComponentLink2URL=http://www.ti.com/lit/ds/symlink/lm5166.pdf, Device Class L1="Integrated Circuits (ICs)", Device Class L2="Power Management ICs", Device Class L3="Voltage Regulators - Switching", Digikey Description="IC REG BUCK ADJ 500MA 10VSON", Height=1mm, Lead Free=Yes, Manufacturer Part Number=LM5166DRCR, Max Duty Cycle=100%, Number Of Outputs=1, Octopart=https://octopart.com/lm5166drcr-texas+instruments-77040222, Output Type=AdjustableProgrammable, RoHS=TRUE, Standoff Height=0mm, Switching Topology=Buck, Temperature Range High=+150°C
U6: library part CMP-0394-00524-3, "None", Case/Package=SOT-23, Dropout Voltage=220mV, Max Input Voltage=5.5V, Max Operating Temperature=125°C, Max Output Current=300mA, Max Output Voltage=3.3V, Max Power Dissipation=500mW, Min Current Limit=320mA, Min Input Voltage=2V, Min Operating Temperature=-40°C, Output Voltage Accuracy=0.5%, Package Quantity=1, Power Supply Rejection Ratio (PSRR)=68dB, Quiescent Current=30uA, Accuracy=2%, Height=1.45mm, Lead Free="Lead Free", Length=3.05mm, Min Output Voltage=3.3V, Nominal Output Voltage=3.3V, Number Of Outputs=1, Number of Pins=5, Number of Regulators=1, Output Current=300mA, Output Type=Fixed, Output Voltage=3.3V, Packaging="Tape and Reel", Polarity=Positive, Power Dissipation=500mW, Radiation Hardening=No, REACH SVHC="No SVHC", RoHS Compliant=Yes, Series=-, Width=1.75mm
U7: library part CMP-04918-000350-1, Max Operating Temperature=125°C, Min Operating Temperature=-40°C, Switching Frequency=600kHz, Clock Sync=Yes, Max Duty Cycle=100%, Number of Output Phases=1, Number Of Outputs=1, Number of Pins=28, Output Configuration=Positive, Packaging="Tape and Reel", RoHS Compliant=Yes, Synchronous Rectifier=Yes, Topology=Buck-Boost
U8: library part CMP-04895-000442-1, "IC OPAMP GP 2 CIRCUIT 8SOIC", Case/Package=SOIC, Input Bias Current=15pA, Input Offset Voltage (Vos)=1mV, Max Operating Temperature=125°C, Min Operating Temperature=-40°C, Operating Supply Current=90uA, Output Current per Channel=40mA, Gain Bandwidth Product=1MHz, Mount="Surface Mount", Number of Circuits=2, Number of Pins=8, Packaging="Cut Tape", RoHS Compliant=Yes, Slew Rate=1.5V/µs
U9: "200 Î¼A, 36V, Rail-to-Rail Out Instrumentation Amplifier with Shutdown 10-VSON -40 to 125", Manufacturer_Name="Texas Instruments", Copyright="Copyright (C) 2025 Ultra Librarian. All rights reserved.", Datasheet=https://www.ti.com/lit/gpn/ina826s, Manufacturer_Part_Number=INA826SIDRCR, RefDes=RefDes, Type=Type

## Free pads (board coordinates)
  round 5 hole 3: MH1(3.175,96.52) MH2(3.175,3.302) MH3(135.636,3.302) MH4(135.636,96.393)

## Via types
v1: diameter 0.75, hole 0.3, Top Layer to Bottom Layer, tented both sides, 1006 vias
v2: diameter 0.75, hole 0.3, Top Layer to Bottom Layer, tented top, 1 vias

## Nets (pads, with @x,y where several pads share a name; then routed paths per layer and width w, separated by ;. In a path a pad name is that pad's centre, name@x,y a point inside that pad or via, vN(x,y) a via of type N, cw(c..) or ccw(c..) an arc to the next point about the centre after c; other vN are vias at no path point)
3V3: C18.2 C19.2 C23.2 C27.2 C28.2 C29.2 C31.2 C51.2 P4.2 R7.1 R14.2 R16.2 R33.1 R40.1 R41.1 R42.1 R43.1 R44.1 R45.1 R73.2 U1.1 U1.9 U1.17 U1.24 U1.48 U4.32 U6.5 U8.8 U9.5 U9.10 | length 390.1
  Top Layer w0.254: R44.1@2.056,60.325 R43.1@2.056,61.792 2.056,61.892 0.508,63.44 0.508,69.977 1.905,71.374 P4.2@2.159,71.374 ; v1(14.47,76.384) 15.195,77.108 U1.9@17.919,77.108 ; v1(21.257,70.592) 21.269,70.604 U1.17@21.269,74.258 ; v1(26.162,36.837) 26.767,37.442 U4.32@26.767,37.684 ; C51.2@101.417,18.785 102.622,19.99 103.251,19.99 ; U9.10@105.413,19.99 103.251,19.99 ; U9.5@107.413,17.094 107.413,17.374 107.744,17.374 107.95,17.58 107.95,21.717 106.277,23.39 104.289,23.39 103.251,22.352 103.251,19.99
  Top Layer w0.508: 18.082,81.279 v1(18.082,82.422) 19.098,82.422 ; 24.94,73.659 25.259,73.659 25.575,73.344 v1(25.575,73.278)
  Top Layer w0.635: R33.1@34.572,98.794 R7.1@36.703,98.794 R14.2@38.834,98.794 R16.2@40.965,98.794 41.065,98.794 R16.2@41.097,98.827 ; R16.2@41.097,98.806 v1(70.612,98.806) 78.232,98.806 78.681,98.357 78.681,97.723 78.914,97.49 78.007,96.583 78.007,95.383 78,95.377 U8.8@77.09,95.377
  Top Layer w0.762: v1(33.909,37.592) 33.917,37.6 C19.2@35.207,37.6 ; U6.5@88.802,7.742 88.764,7.78 88.764,11.138 C23.2@88.726,11.176 88.726,11.476 96.035,18.785 C51.2@101.367,18.785
  Top Layer w1.27: v1(82.55,16.256) 83.946,16.256 C23.2@88.726,11.476
  PWR w0.508: P4.2@2.159,71.374 3.421,72.636 10.722,72.636 v1(14.47,76.384) ; v1(26.162,36.837) 26.208,36.791 33.108,36.791 v1(33.909,37.592)
  PWR w1.27: v1(33.909,37.592) 34.943,37.592 35.687,36.848 35.687,34.798 31.091,30.202 C18.2@31.091,29.607 31.091,28.726 43.561,16.256 69.342,16.256 ; v1(34.036,76.454) 44.45,76.454 49.403,81.407 v1(59.69,81.407) ; v1(59.69,37.592) 69.342,27.94 69.342,16.256 ; v1(82.55,16.256) 69.342,16.256
  Bottom Layer w0.254: v1(14.47,76.384) 14.47,76.323 14.974,75.819 R40.1@14.974,73.66 ; R42.1@14.974,67.31 14.994,67.33 14.994,68.942 R41.1@15.013,68.961 19.626,68.961 ; R45.1@15.113,58.42 15.113,58.52 19.626,63.033 19.626,68.961 ; v1(21.257,70.592) 19.626,68.961
  Bottom Layer w0.508: v1(14.47,76.384) 15.615,77.528 C27.2@19.524,77.528 ; v1(18.082,82.422) 18.082,78.97 C27.2@19.524,77.528 ; C27.2@19.824,77.528 C27.2@19.524,77.528 ; v1(21.257,70.592) 21.257,70.652 22.031,71.426 22.031,73.278 ; C28.2@21.907,77.528 22.031,77.405 R73.2@22.031,75.691 22.031,73.278 ; v1(25.575,73.278) 22.031,73.278
  Bottom Layer w1.016: C27.2@19.824,77.528 C28.2@21.907,77.528 C29.2@23.991,77.528 32.962,77.528 v1(34.036,76.454)
  Bottom Layer w1.27: v1(59.69,37.592) v1(59.69,81.407) 59.69,87.884 v1(70.612,98.806)
5V: C15.2 C16.2 C17.2 C21.2 C24.2 C25.2 C26.2 L1.1 R69.2 U4.28 U4.29 U6.1 U6.3 | length 126.3
  Top Layer w0.635: R69.2@66.656,10.129 66.656,10.167 67.823,11.334 67.823,12.023 C21.2@67.992,12.192 ; C26.2@68.025,14.478 68.008,14.462 68.008,12.208 C21.2@67.992,12.192 ; U6.3@85.852,5.842 85.577,5.842 85.569,5.834 85.569,5.833 85.198,5.461 82.677,5.461 81.407,6.731 ; U6.1@85.852,7.742 85.577,7.742 85.569,7.749 85.569,7.756 85.198,8.128 82.804,8.128 81.407,6.731 ; C21.2@67.992,12.192 73.742,12.192 79.203,6.731 81.407,6.731
  Top Layer w0.762: v1(33.909,39.751) C17.2@35.207,39.751
  Top Layer w1.016: C26.2@68.025,14.478 68.025,17.066 C24.2@72.811,21.852
  Top Layer w1.27: L1.1@63.701,25.654 72.736,25.654 72.811,25.729 ; C24.2@72.811,21.852 72.811,25.729 ; C25.2@72.811,29.607 72.811,25.729
  PWR w0.508: v1(25.019,38.735) 26.162,38.735 27.305,37.592 31.75,37.592 v1(33.909,39.751)
  PWR w1.27: v1(33.909,39.751) 36.576,39.751 38.257,38.07 38.257,33.879 40.665,31.471 C16.2@40.665,29.607 40.665,21.974 C15.2@40.787,21.852
  Bottom Layer w1.27: C15.2@40.787,21.852 48.542,29.607 C25.2@72.811,29.607
ADCIN1: R65.1 R67.2 U4.2 | length 26.1
  Top Layer w0.178: v1(26.924,33.782) 26.924,35.179 27.823,36.078 27.823,37.144 U4.2@27.829,37.15
  Top Layer w0.254: v1(25.781,49.022) 25.888,49.022 27.605,50.739 R67.2@27.705,50.739 R65.1@29.781,50.739
  Bottom Layer w0.254: v1(25.781,49.022) 25.711,48.952 25.711,47.682 24.206,46.177 24.206,41.28 23.933,41.006 23.933,36.155 26.306,33.782 v1(26.924,33.782)
ADCIN2: R66.1 R68.2 U4.3 | length 25
  Top Layer w0.178: v1(28.067,34.163) 28.067,34.318 28.229,34.48 U4.3@28.229,37.15
  Top Layer w0.254: v1(28.321,48.895) 29.913,48.895 31.757,50.739 R66.1@31.857,50.739 R68.2@33.934,50.739
  Bottom Layer w0.254: v1(28.067,34.163) 28.067,37.211 27.178,38.1 27.178,47.752 v1(28.321,48.895)
BOOT0: R36.1 SW2.1 | length 44.3
  Top Layer w0.254: v1(16.256,93.98) 16.256,92.928 R36.1@16.36,92.824 ; v1(55.753,97.282) 55.753,95.887 SW2.1@55.844,95.796
  PWR w0.254: v1(16.256,93.98) 17.145,93.091 51.562,93.091 v1(55.753,97.282)
BOOT1: C38.2 D4.2 U7.26 | length 47.9
  Top Layer w0.33: U7.26@76.435,69.473 U7.26@76.435,69.473 77.59,69.475 79.041,70.926 79.041,71.167 v1(79.121,71.247)
  Top Layer w0.762: D4.2@45.72,64.072 49.847,64.072 v1(50.99,62.928) 52.541,61.378 C38.2@54.972,61.378
  PWR w0.508: v1(50.99,62.928) 60.167,62.928 61.177,63.938 75.876,63.938 79.121,67.183 v1(79.121,71.247)
BOOT2: C39.2 D5.2 U7.20 | length 53.4
  Top Layer w0.33: U7.20@76.435,65.573 81.747,65.573 v1(84.074,63.246)
  Top Layer w0.762: D5.2@45.72,60.325 45.847,60.198 v1(50.292,60.198) 51.373,59.117 C39.2@54.972,59.117
  PWR w0.508: v1(50.292,60.198) 77.851,60.198 80.899,63.246 v1(84.074,63.246)
C_CC1: J1.A5 R50.2 U2.4 | length 10.4
  Top Layer w0.178: 19.05,44.323 19.285,44.558 U2.4@19.972,44.558
  Top Layer w0.203: J1.A5@10.16,43.18 10.62,43.18
  Top Layer w0.254: 10.62,43.18 17.358,43.18 R50.2@17.37,43.168 ; R50.2@17.443,43.095 17.666,43.318 18.045,43.318 19.05,44.323
C_CC2: J1.B5 R52.2 U2.5 | length 25.9
  Top Layer w0.152: U2.5@19.829,44.138 19.849,44.158 U2.5@19.972,44.158
  Top Layer w0.254: v1(16.891,37.719) 18.208,37.719 R52.2@18.246,37.681 ; v1(19.405,43.171) 19.405,43.305 19.656,43.555 U2.5@19.656,44.081
  Bottom Layer w0.254: J1.B5@8.132,41.618 6.947,41.618 6.35,41.021 6.35,38.1 8.255,36.195 15.367,36.195 v1(16.891,37.719) 19.405,40.233 v1(19.405,43.171)
C_SBU1: R60.1 R62.2 R64.2 U2.1 | length 10
  Top Layer w0.178: R60.1@17.323,50.739 19.685,48.377 19.685,45.855
  Top Layer w0.254: R60.1@17.323,50.739 R64.2@19.399,50.739 R62.2@21.475,50.739
C_SBU2: R59.1 R61.2 R63.2 U2.2 | length 17.7
  Top Layer w0.178: R59.1@15.246,50.739 v1(17.181,48.804) 18.669,47.316 18.669,46.087 19.39,45.365 19.965,45.365 U2.2@19.972,45.358 ; R61.2@23.368,50.555 R61.2@23.552,50.739